# Altium PCB PJ1301-MAINPCB.PcbDoc (part 1 of 4)
Units mm, origin at the board's own origin, x right, y up, seen from the top; angles counter-clockwise.
Board outline 163.83 x 187.81 mm, 4 copper layers (Top Layer, GND, POWER, Bottom Layer); 435 components, 348 nets, 1618 pads, 913 vias.
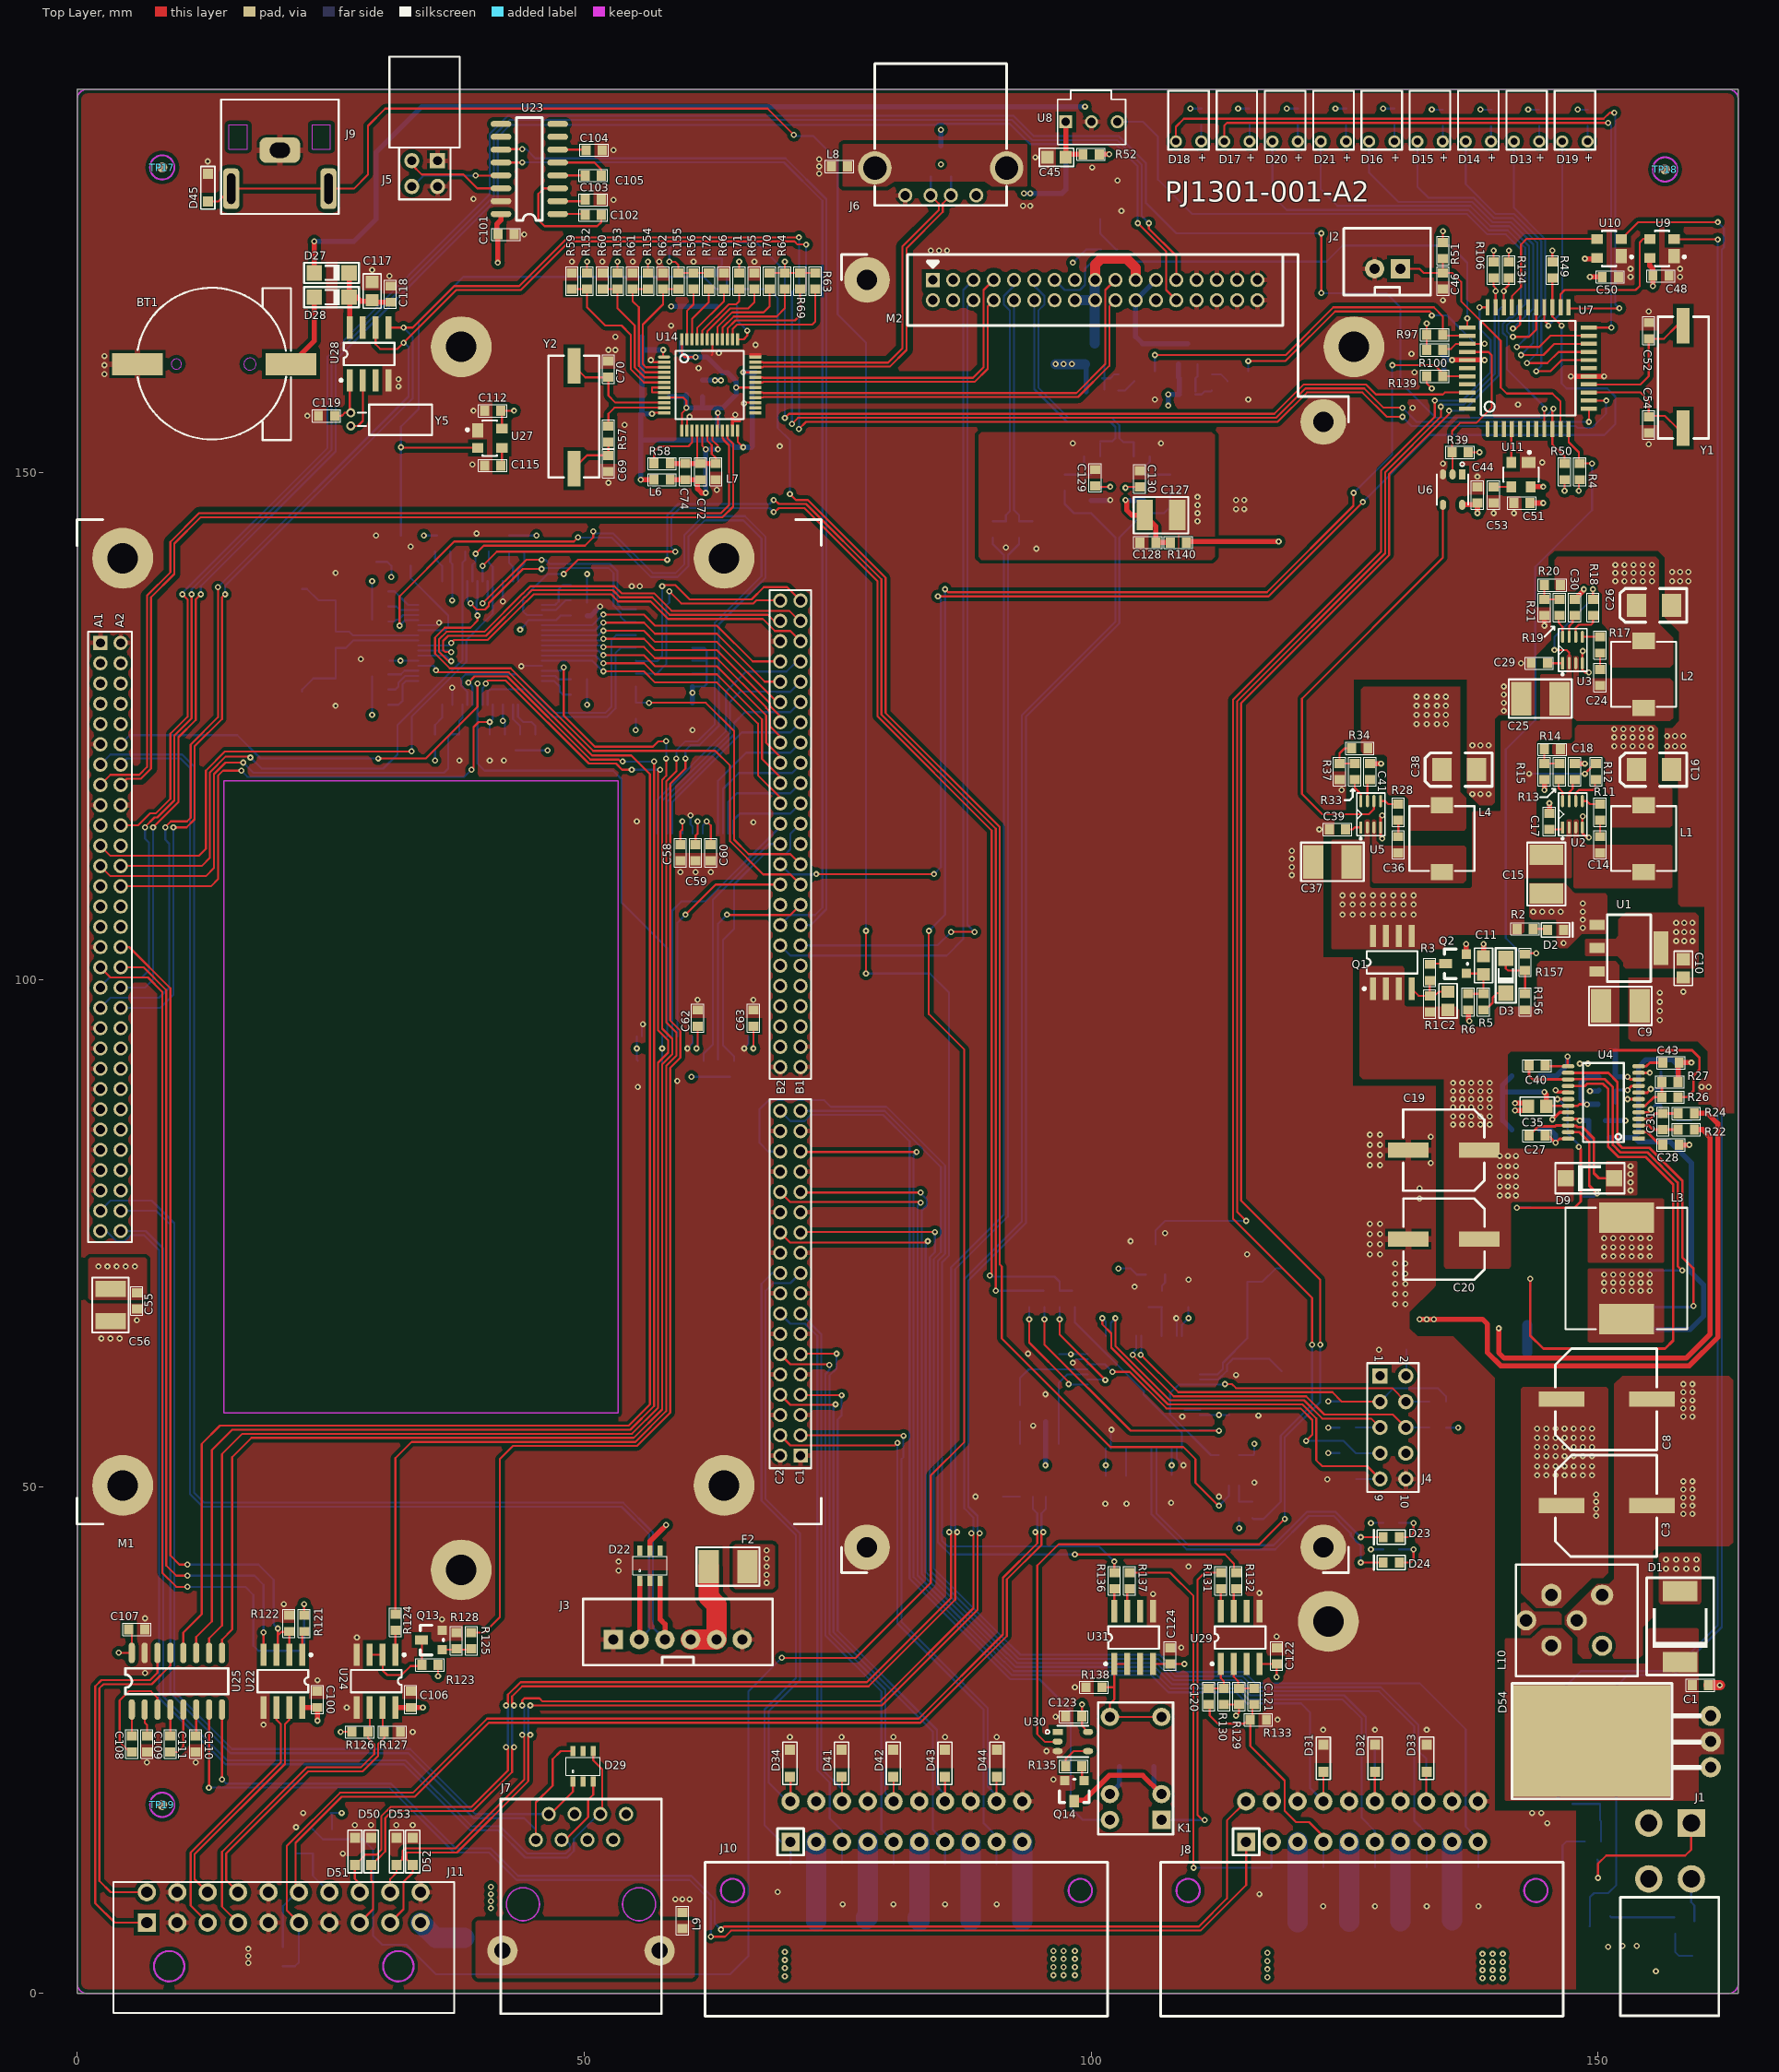
[diagram p0: Top Layer view]
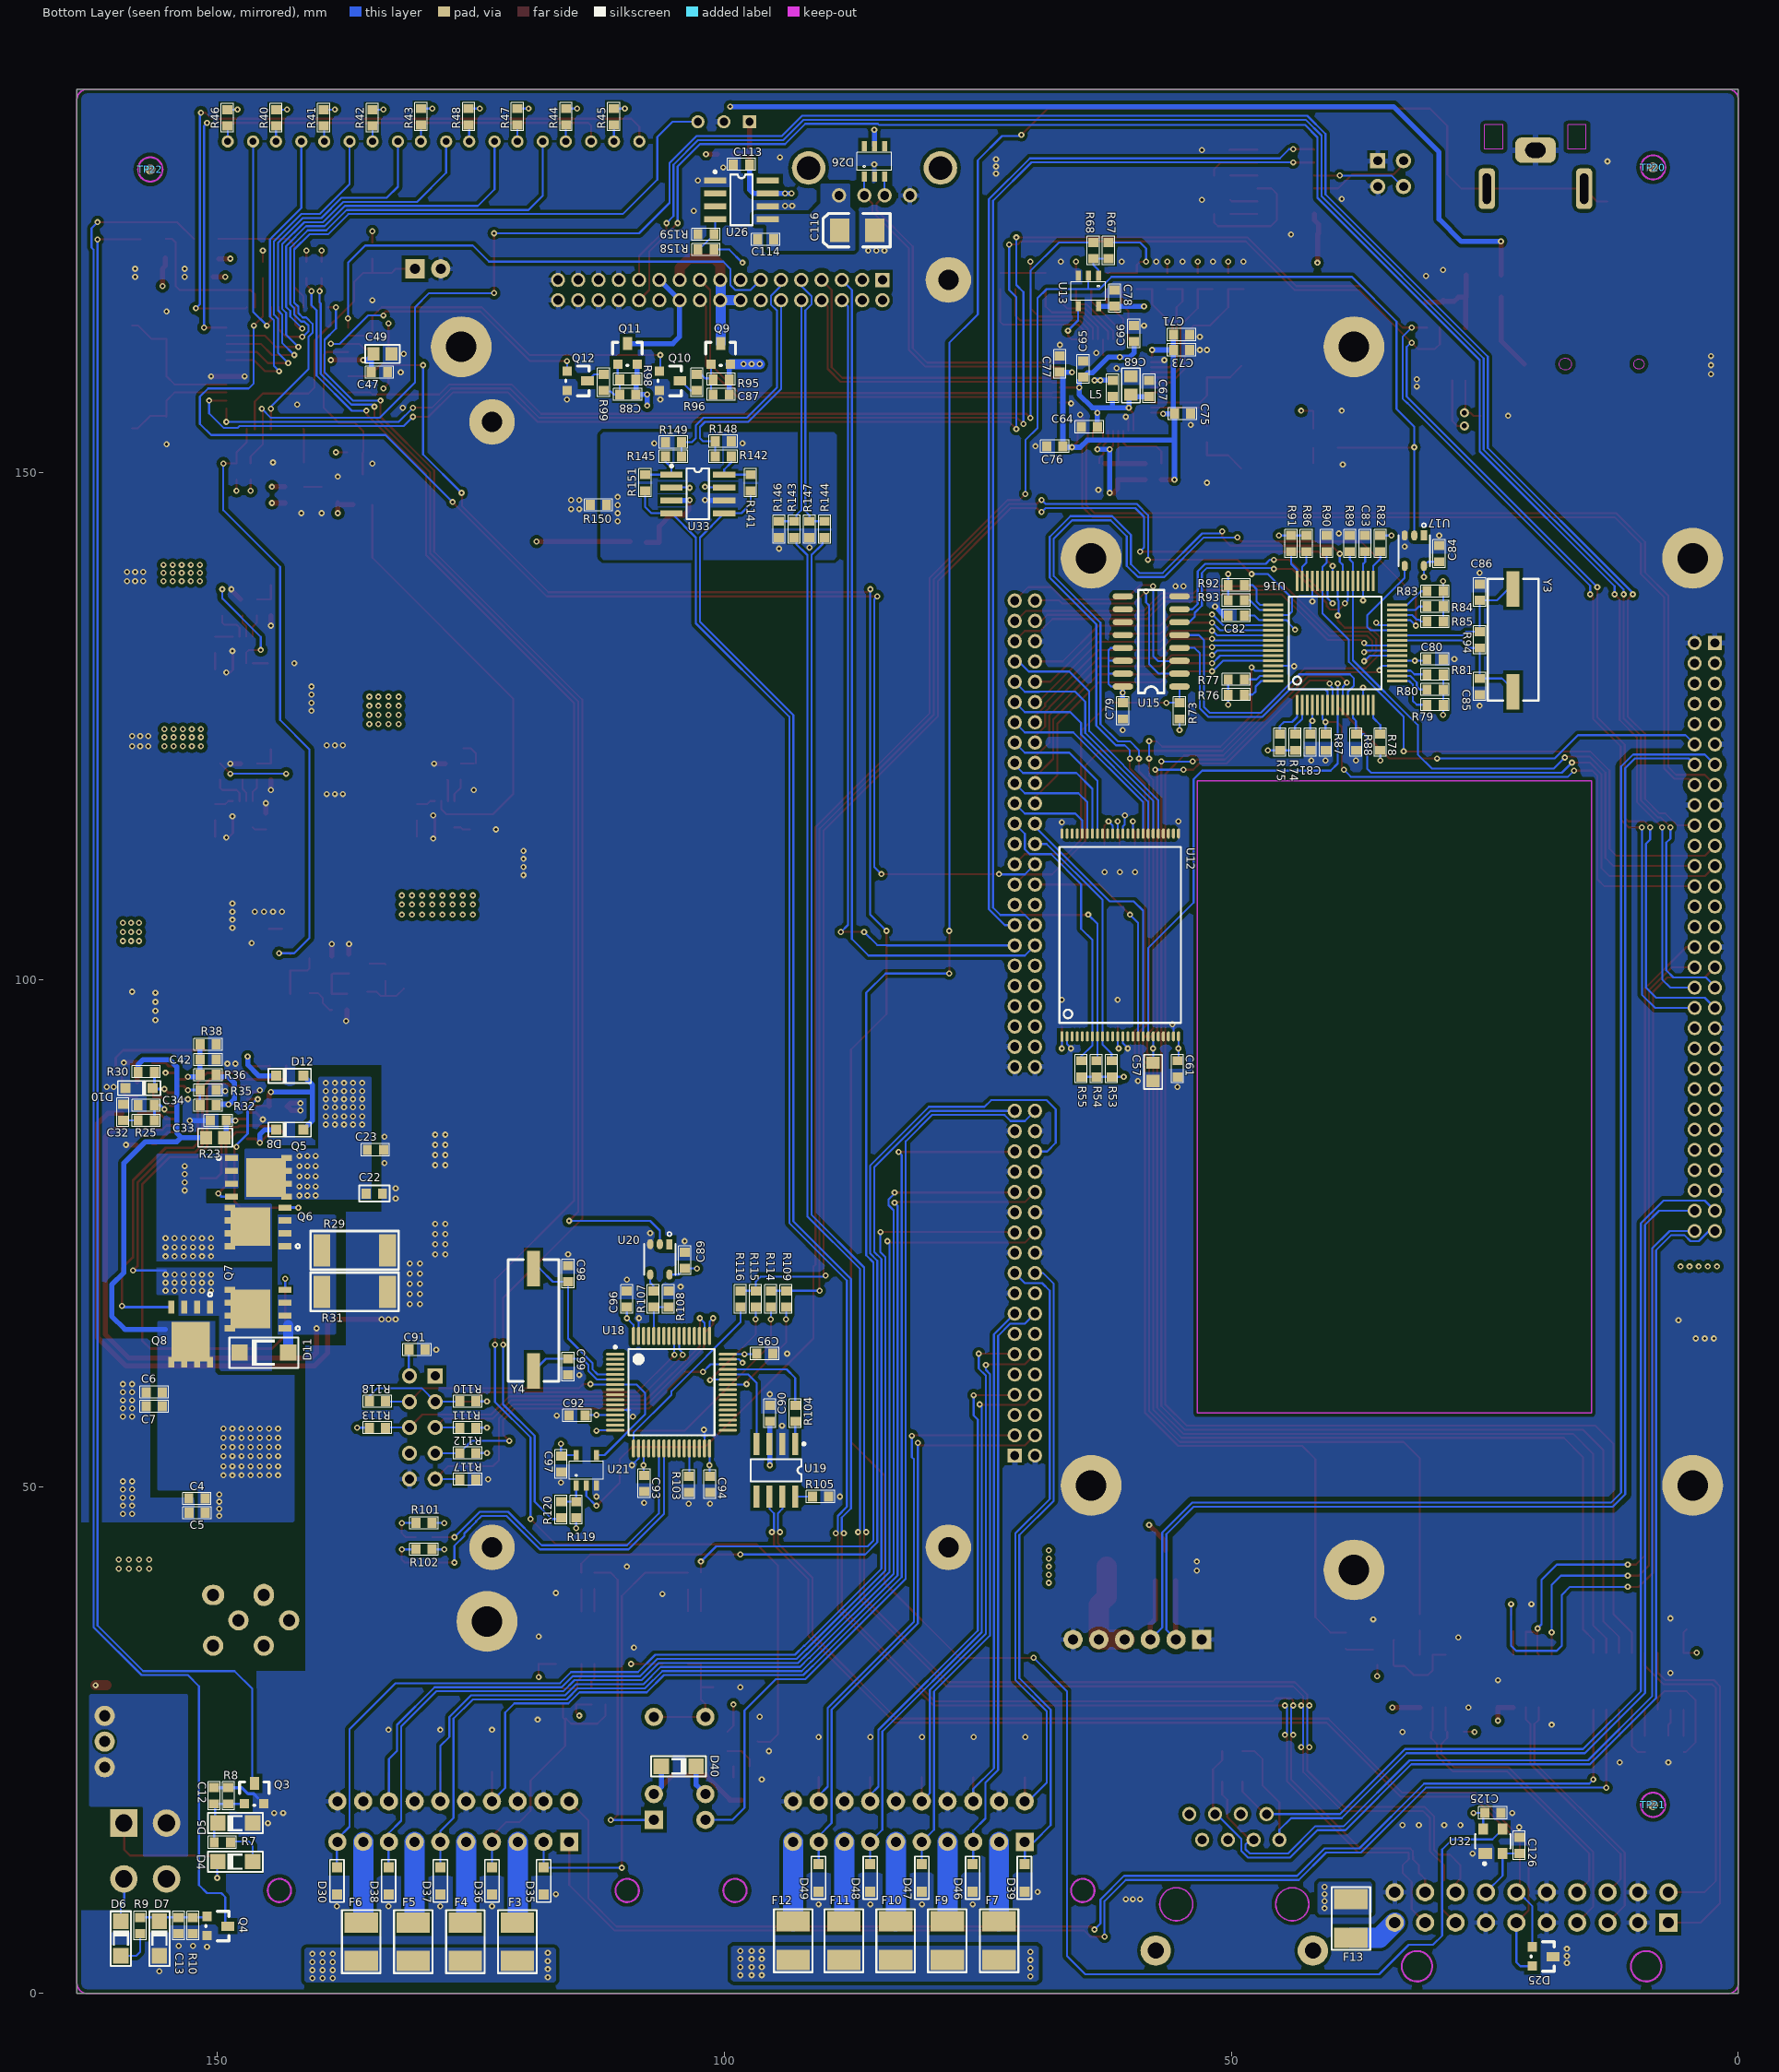
[diagram p1: Bottom Layer view, seen from below]
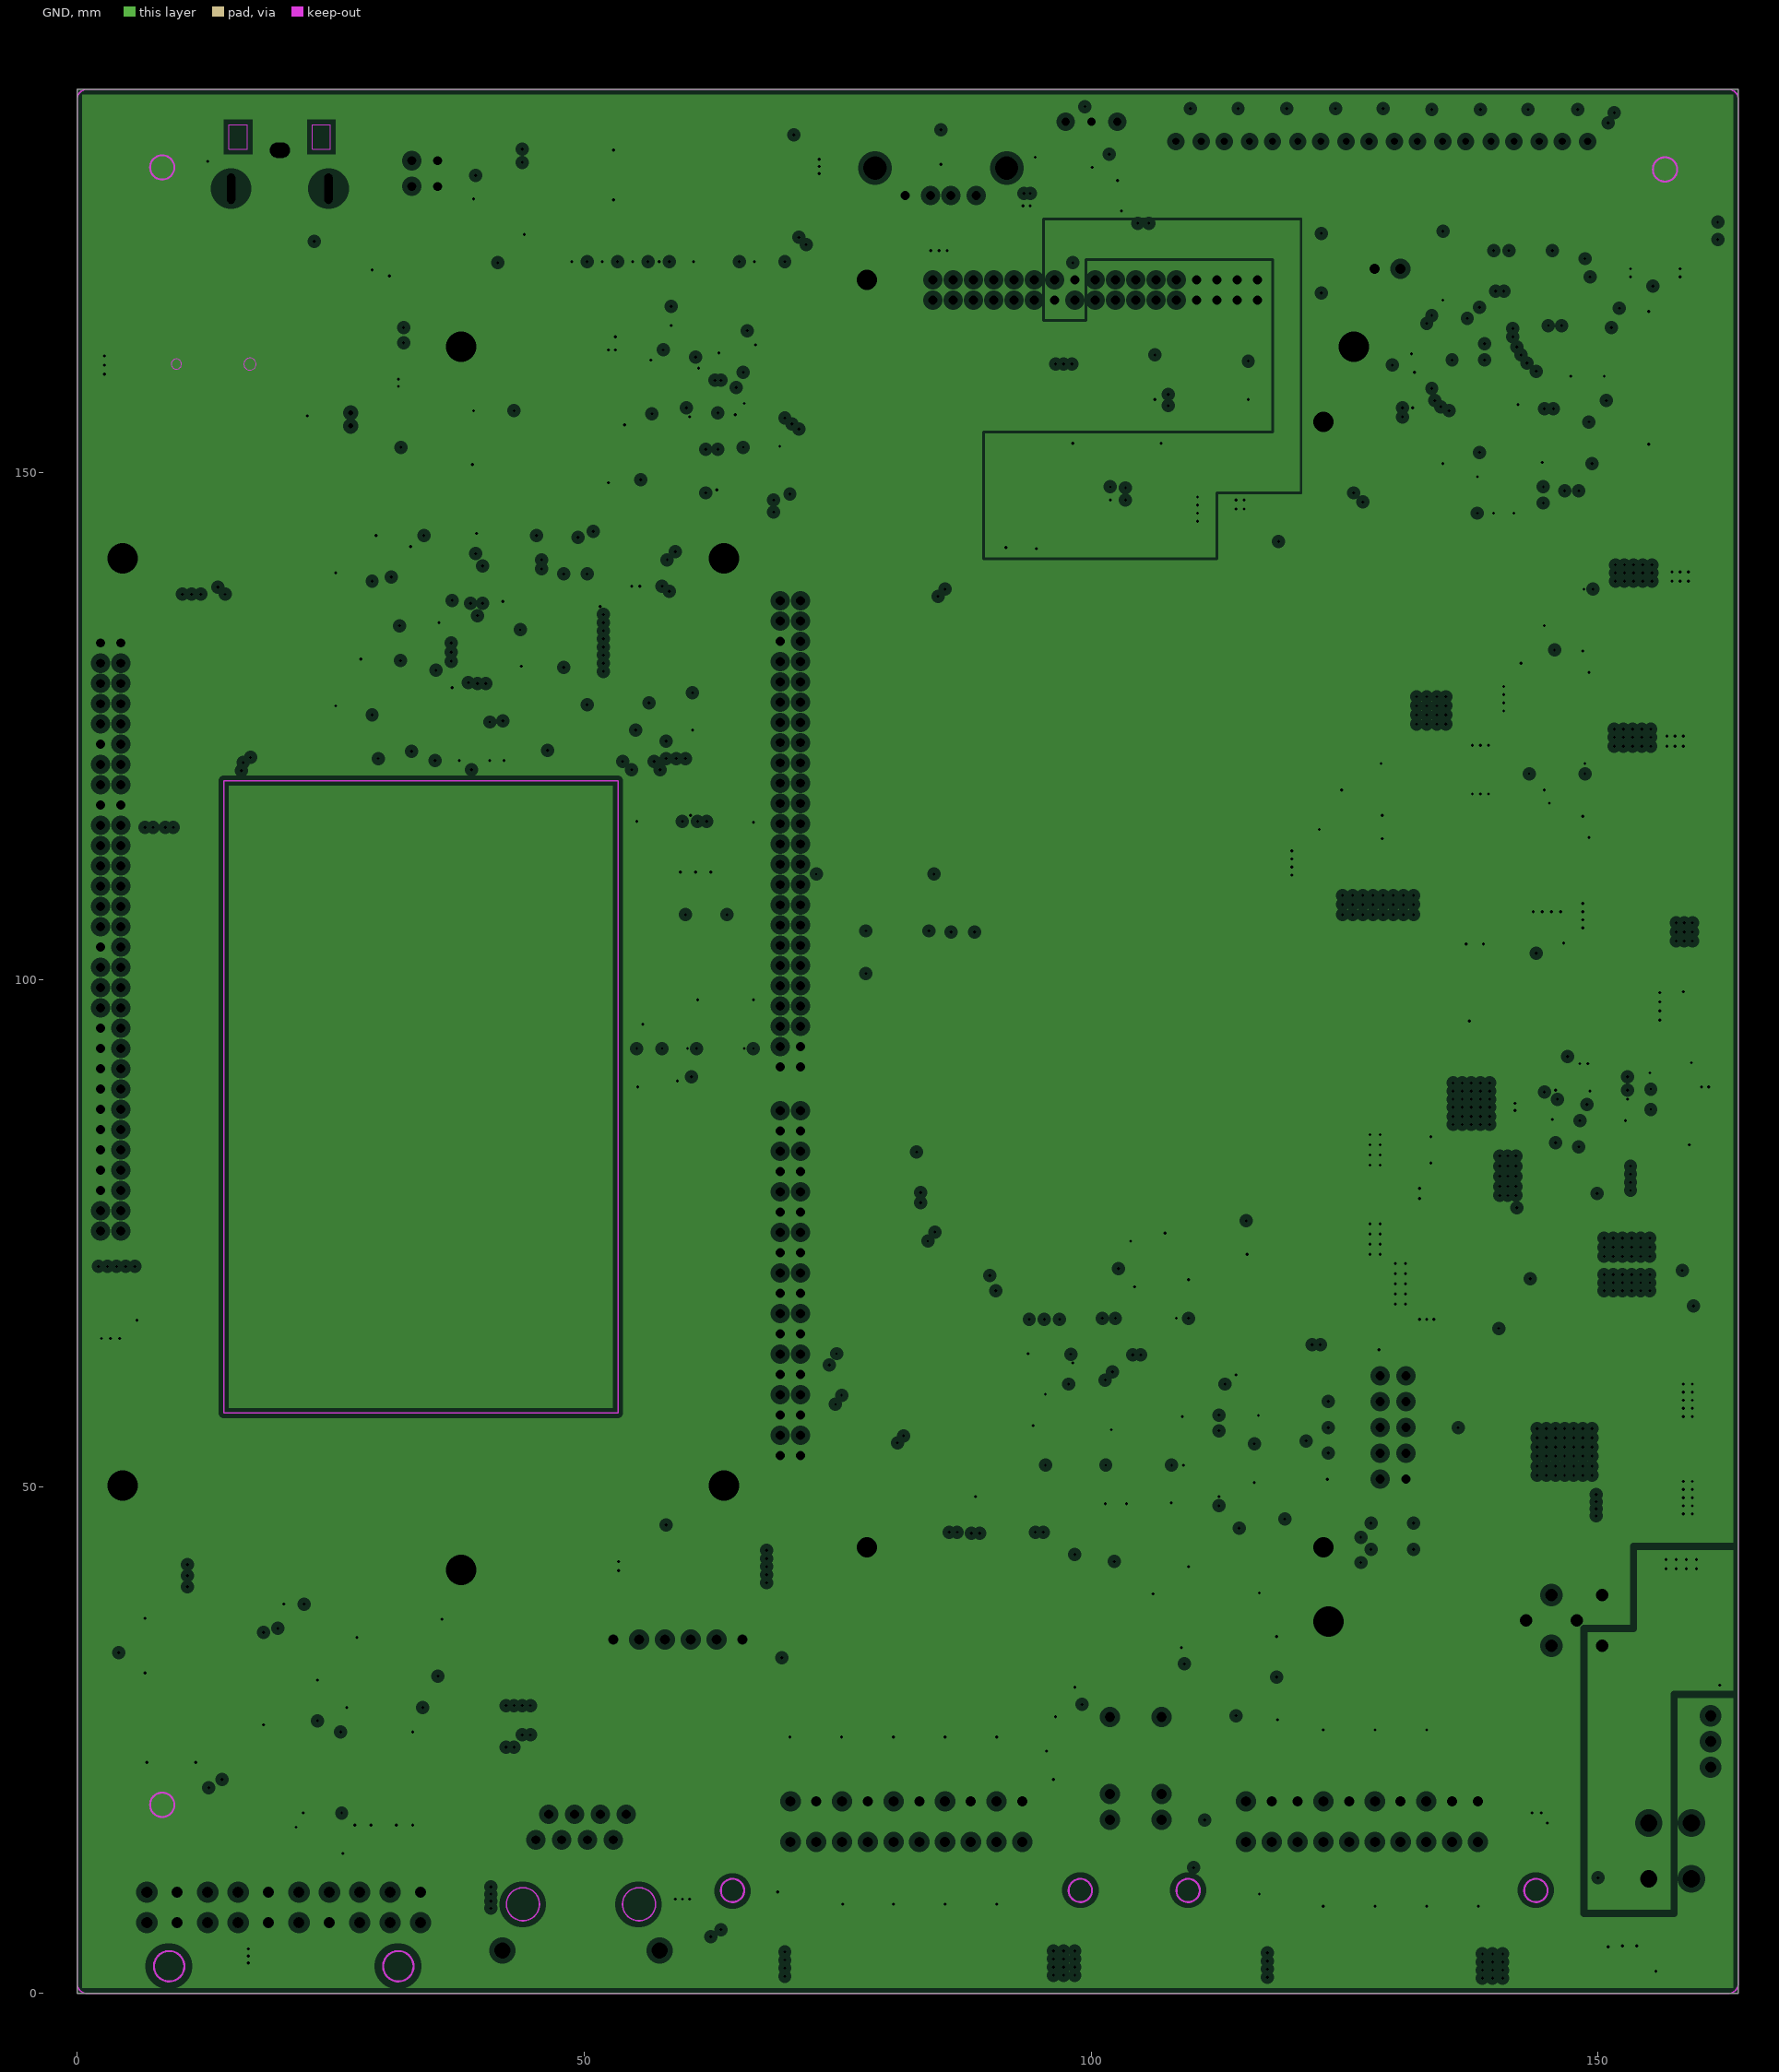
[diagram p2: GND, clearances drawn from the general rule]
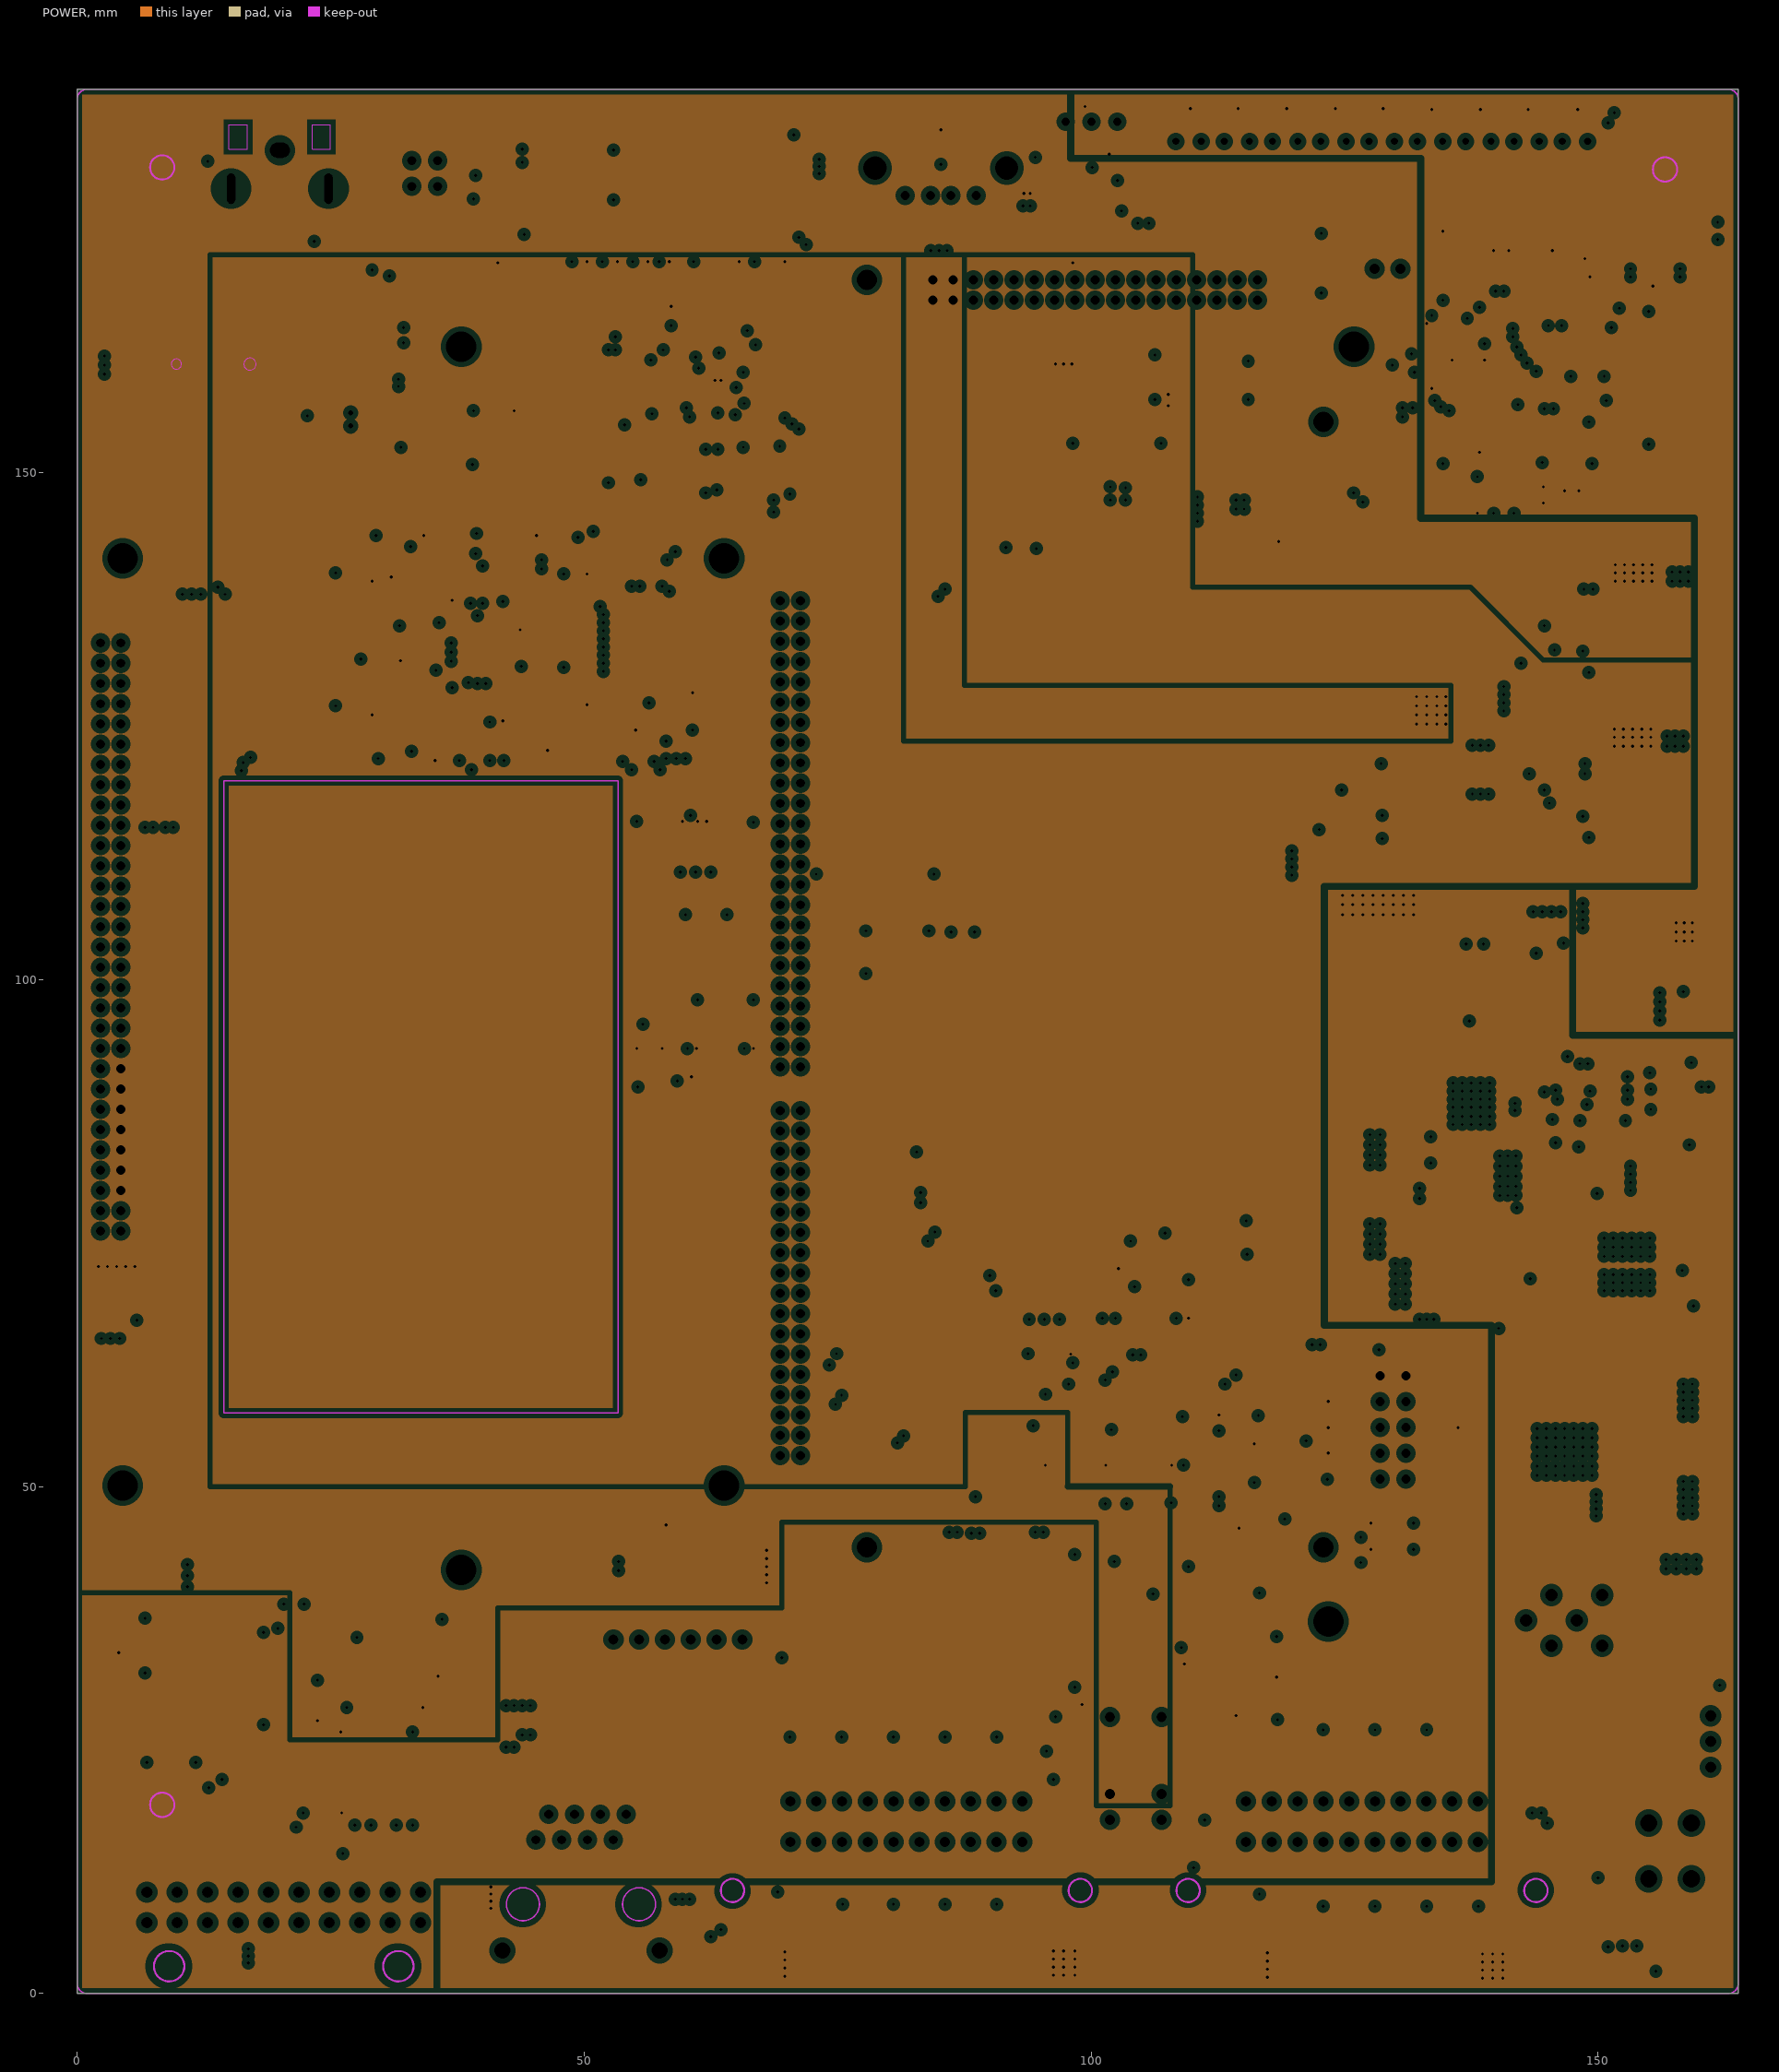
[diagram p3: POWER, clearances drawn from the general rule]

## Layer stack, top to bottom
Top Solder: solder mask 0.0102, Solder Resist, Dk 3.5
Top Layer: signal copper 0.0356
Dielectric1: core 0.32, FR-4, Dk 4.8
GND: plane copper 0.0356
Dielectric2: prepreg 0.32, FR-4, Dk 4.8
POWER: plane copper 0.0356
Dielectric3: core 0.32, FR-4, Dk 4.8
Bottom Layer: signal copper 0.0356
Bottom Solder: solder mask 0.0102, Solder Resist, Dk 3.5

## Board outline
0,0 163.83,0 163.83,187.808 0,187.808 0,0

## Design rules (kind name [scope] priority, off if disabled: settings)
Clearance Clearance_3 [InDifferentialPair('USB0') OR InDifferentialPair('USB1') OR InDifferentialPair('USB2') OR InDifferentialPair('USB3') OR InDifferentialPair('USB4') vs InNet('GND')] p1: gap=0.508
Clearance Clearance_4 [InPolygon AND InNet('GND')] p2: gap=0.35
Clearance Clearance_2 [InComponent('J5') OR InComponent('M2') OR InComponent('U14') OR InComponent('U16') OR InComponent('M1') OR InComponent('U12') OR InComponent('U4')  OR InComponent('U18') OR InComponent('J8') OR InComponent('J10') OR InComponent('U5') OR InComponent('R28') OR InComponent('C36') OR InComponent('U2') OR InComponent('R11') OR InComponent('C14') OR InComponent('U3') OR InComponent('R17') OR InComponent('C24')] p3: gap=0.2
Clearance Clearance_1 [InNet('AGND') OR InNet('GND')] p4: gap=0.254
Clearance [All] p5: gap=0.2
ComponentClearance [All] p1: gap=0 collisioncheckmode=3 verticalgap=0 showdistances=FALSE
DiffPairsRouting [All] p1: maxlimit=0.254 minlimit=0.2 mostfreqgap=0.2 toplayer_minwidth=0.381 toplayer_maxwidth=0.381 toplayer_prefwidth=0.381 bottomlayer_minwidth=0.381 bottomlayer_maxwidth=0.381 bottomlayer_prefwidth=0.381 maxuncoupledlength=12.7
PlaneClearance PlaneClearance_1 [InPadClass('MT')] p1: clearance=1
PlaneClearance [All] p2: clearance=0.508
PlaneConnect PlaneConnect_5 [InPadClass('L10')] p1: planeconnectstyle=Direct reliefexpansion=0.508 reliefentries=4 reliefconductorwidth=0.254 reliefairgap=0.254
PlaneConnect PlaneConnect_4 [InPadClass('MT2')] p2: planeconnectstyle=Direct reliefexpansion=0.508 reliefentries=4 reliefconductorwidth=0.254 reliefairgap=0.254
PlaneConnect PlaneConnect_3 [InPadClass('MT')] p3: planeconnectstyle=Direct reliefexpansion=0.508 reliefentries=4 reliefconductorwidth=0.254 reliefairgap=0.254
PlaneConnect PlaneConnect_2 [(InComponent('J1') OR InComponent('L10'))] p4: planeconnectstyle=Relief reliefexpansion=0.508 reliefentries=4 reliefconductorwidth=0.8 reliefairgap=0.508
PlaneConnect PlaneConnect_1 [IsVia] p5: planeconnectstyle=Direct reliefexpansion=0.508 reliefentries=4 reliefconductorwidth=0.254 reliefairgap=0.254
PlaneConnect [All] p6: planeconnectstyle=Relief reliefexpansion=0.508 reliefentries=4 reliefconductorwidth=0.254 reliefairgap=0.254
PolygonConnect PolygonConnect_3 [InPadClass('MT2')] p1: connectstyle=Direct reliefconductorwidth=0.254 reliefentries=4 polygonreliefangle="90 Angle" airgapwidth=0.254
PolygonConnect PolygonConnect_2 [InComponent('J9') OR InComponent('BT1') OR InComponent('C19') OR InComponent('C20')] p2: connectstyle=Relief reliefconductorwidth=0.6 reliefentries=4 polygonreliefangle="90 Angle" airgapwidth=0.254
PolygonConnect PolygonConnect_1 [InComponent('J11') OR InComponent('J10') OR InComponent('J8') OR InComponent('J3') OR InComponent('M1') OR InComponent('M2') OR InComponent('J5') OR InComponent('J2') OR InComponent('J6') OR InComponent('U8') OR InComponent('J4')] p3: connectstyle=Relief reliefconductorwidth=0.5 reliefentries=4 polygonreliefangle="90 Angle" airgapwidth=0.254
PolygonConnect [All] p4: connectstyle=Direct reliefconductorwidth=0.254 reliefentries=4 polygonreliefangle="90 Angle" airgapwidth=0.254
RoutingVias [All] p1: holewidth=0.3 width=0.6 viastyle="Through Hole" minholewidth=0.3 minwidth=0.6 maxholewidth=0.3 maxwidth=0.6
SilkToSilkClearance [All] p1: silktosilkclearance=0
SilkToSolderMaskClearance SilkscreenOverComponentPads [IsPad] p1: minsilkscreentomaskgap=0 clearancetoexposedcopper=TRUE
SolderMaskExpansion [All] p1: expansion=0.102
Width [All] p1: maxlimit=4 minlimit=0.127 preferedwidth=0.2 minimp=50.000000 maximp=50.000000 favimp=50.000000
24 further rules are at their usual default settings.

## Classes and differential pairs
pad class MT: Free-MT1 Free-MT2 Free-MT3 Free-MT4 M1-MT5 M1-MT6 M1-MT7 M1-MT8 M2-MT9 M2-MT10 M2-MT11 M2-MT12
component class [01]POWER: C1 C2 C3 C4 C5 C6 C7 C8 C9 C10 C11 C12 C13 C14 C15 C16 C17 C18 C19 C20 C22 C23 C24 C25 C26 C27 C28 C29 C30 C31 C32 C33 C34 C35 C36 C37 C38 C39 C40 C41 C42 C43 C44 D1 D2 D3 D4 D5 D6 D7 D8 D9 D10 D11 D12 D54 J1 L1 L2 L3 L4 L10 Q1 Q2 Q3 Q4 Q5 Q6 Q7 Q8 R1 R2 R3 R4 R5 R6 R7 R8 R9 R10 R11 R12 R13 R14 R15 R17 R18 R19 R20 R21 R22 R23 R24 R25 R26 R27 R28 R29 R30 R31 R32 R33 R34 R35 R36 R37 R38 R39 R156 R157 U1 U2 U3 U4 U5 U6
component class [02]MCU: C45 C46 C47 C48 C49 C50 C51 C52 C53 C54 D13 D14 D15 D16 D17 D18 D19 D20 D21 J2 R40 R41 R42 R43 R44 R45 R46 R47 R48 R49 R50 R51 R52 U7 U8 U9 U10 U11 Y1
component class [03]CORE_BOARD: C55 C56 M1
component class [04]STORAGE: C57 C58 C59 C60 C61 C62 C63 D22 F2 J3 R53 R54 R55 U12
component class [05]USB_HUB: C64 C65 C66 C67 C68 C69 C70 C71 C72 C73 C74 C75 C76 C77 C78 L5 L6 L7 R56 R57 R58 R59 R60 R61 R62 R63 R64 R65 R66 R67 R68 R69 R70 R71 R72 R152 R153 R154 R155 U13 U14 Y2
component class [06]EXT_UART: C79 C80 C81 C82 C83 C84 C85 C86 R73 R74 R75 R76 R77 R78 R79 R80 R81 R82 R83 R84 R85 R86 R87 R88 R89 R90 R91 R92 R93 R94 U15 U16 U17 Y3
component class [07]COMM_BOARD: C87 C88 M2 Q9 Q10 Q11 Q12 R95 R96 R97 R98 R99 R100
component class [08]CAN: C89 C90 C91 C92 C93 C94 C95 C96 C97 C98 C99 D23 D24 D25 J4 R101 R102 R103 R104 R105 R106 R107 R108 R109 R110 R111 R112 R113 R114 R115 R116 R117 R118 R119 R120 U18 U19 U20 U21 Y4
component class [09]SERIAL_PORT: C100 C101 C102 C103 C104 C105 C106 C107 C108 C109 C110 C111 J5 Q13 R121 R122 R123 R124 R125 R126 R127 R128 U22 U23 U24 U25
component class [10]MISC: BT1 C112 C113 C114 C115 C116 C117 C118 C119 D26 D27 D28 D29 J6 J7 L8 L9 R158 R159 U26 U27 U28 Y5
component class [11]VIDEO_PORT: C120 C121 C122 C123 C124 D30 D31 D32 D33 D34 D35 D36 D37 D38 D39 D40 D41 D42 D43 D44 D45 D46 D47 D48 D49 F3 F4 F5 F6 F7 F9 F10 F11 F12 J8 J9 J10 K1 Q14 R129 R130 R131 R132 R133 R134 R135 R136 R137 R138 U29 U30 U31
component class [12]IO_PORT: C125 C126 C127 C128 C129 C130 D50 D51 D52 D53 F13 J11 R139 R140 R141 R142 R143 R144 R145 R146 R147 R148 R149 R150 R151 U32 U33
pad class MT2: M1-MT5 M1-MT6 M1-MT7 M1-MT8 M2-MT9 M2-MT10 M2-MT11 M2-MT12
pad class L10: L10-2
differential pair AUD-IN: +AUD-IN_P -AUD-IN_N
differential pair AUD-OUT: +AUD-OUT_P -AUD-OUT_N
differential pair C-AUDIO-IN: +C-AUDIO-IN_P -C-AUDIO-IN_N
differential pair C-AUDIO-OUT: +C-AUDIO-OUT_P -C-AUDIO-OUT_N
differential pair CAN: +CAN_P -CAN_N
differential pair E0RX: +E0RX_P -E0RX_N
differential pair E0TX: +E0TX_P -E0TX_N
differential pair RS485-1: +RS485-1_P -RS485-1_N
differential pair RS485-2: +RS485-2_P -RS485-2_N
differential pair USB0: +USB0_P -USB0_N
differential pair USB1: +USB1_P -USB1_N
differential pair USB2: +USB2_P -USB2_N
differential pair USB3: +USB3_P -USB3_N
differential pair USB4: +USB4_P -USB4_N

## Components (designator, comment, footprint, x,y, rotation, side; value= is the part's Value field where it differs from the comment)
BT1 "Battery" CR1220 13.3,160.7 r0 top
C1 "0.1uF" 0603 160.1,30.4 r270 top
C2 "1uF/25V" 0805 135.2,98.8 r270 top
C3 "220uF/50V" DL-10*10.5 150.8,48.1 r90 top
C4 "0.1uF" 0603 152,48.8 r90 bottom
C5 "1000pF" 0603 151.992,47.4 r90 bottom
C6 "0.1uF" 0603 156.2,59.3 r90 bottom
C7 "1000pF" 0603 156.2,57.9 r90 bottom
C8 "220uF/50V" DL-10*10.5 150.8,58.6 r90 top
C9 "10uF/25V" 1812 154.1,97.4 r180 top
C10 "10uF/6.3V" 0805 158.4,100.2 r90 top
C11 "10uF/6.3V" 0805 138.7,102.3 r270 top
C12 "0.1uF" 0603 150.3,19.5 r0 bottom
C13 "0.1uF" 0603 153.8,6.7 r180 bottom
C14 "0.1uF" 0603 150.2,113.3 r180 top
C15 "10uF/25V" 1812 144.9,108.5 r90 top
C16 "47uF/10V(tan)" 3528 153.8,120.7 r180 top
C17 "0.022uF" 0603 145.2,115.6 r0 top
C18 "0.1uF" 0603 147.7,120.5 r0 top
C19 "220uF/25V" DL-8*10.5 134.792,83.171 r270 top
C20 "220uF/25V" DL-8*10.5 134.8,74.4 r270 top
C22 "0.1uF" 0603 134.5,78.9 r270 bottom
C23 "0.1uF" 0603 134.4,83.2 r270 bottom
C24 "0.1uF" 0603 150.2,129.8 r180 top
C25 "10uF/25V" 1812 142.4,127.7 r0 top
C26 "47uF/10V(tan)" 3528 153.8,136.9 r180 top
C27 "0.22uF" 0603 144,84.6 r90 top
C28 "0.033uF" 0603 157.2,83.7 r270 top
C29 "0.022uF" 0603 144.2,131.2 r90 top
C30 "0.1uF" 0603 147.7,136.7 r0 top
C31 "68pF" 0603 156.4,86 r0 top
C32 "0.01uF" 0603 159.3,86.9 r180 bottom
C33 "0.1uF" 0603 149.9,86.1 r90 bottom
C34 "100pF" 0603 157,87.6 r270 bottom
C35 "4.7uF/16V" 0805 144.9,87.5 r180 top
C36 "0.1uF" 0603 130.3,113.3 r180 top
C37 "10uF/25V" 1812 121.9,111.6 r0 top
C38 "47uF/10V(tan)" 3528 134.6,120.7 r180 top
C39 "0.068uF" 0603 124.3,114.8 r90 top
C40 "0.22uF" 0603 144,91.5 r90 top
C41 "0.1uF" 0603 127.5,120.5 r0 top
C42 "1000pF" 0603 150.9,92.1 r90 bottom
C43 "0.01uF" 0603 157.2,91.8 r270 top
C44 "0.1uF" 0603 138.1,147.8 r180 top
C45 "10uF/6.3V" 0805 95.7,181.1 r0 top
C46 "0.1uF" 0603 134.7,168.9 r180 top
C47 "0.1uF" 0603 134,159.9 r270 bottom
C48 "0.1uF" 0603 156.2,169.4 r270 top
C49 "10uF/6.3V" 0805 132.8,161.7 r0 bottom
C50 "0.1uF" 0603 151.2,169.3 r270 top
C51 "0.1uF" 0603 142.5,147 r90 top
C52 "27pF" 0603 155,164 r0 top
C53 "0.1uF" 0603 139.7,147.8 r0 top
C54 "27pF" 0603 155,154.7 r180 top
C55 "0.01uF" 0603 5.9,68.3 r180 top
C56 "22uF/10V" 1210 3.3,66.3 r90 top
C57 "10uF/6.3V" 0805 57.7,90 r90 bottom
C58 "0.1uF" 0603 59.5,112.5 r180 top
C59 "0.1uF" 0603 61,112.5 r180 top
C60 "0.1uF" 0603 62.5,112.5 r180 top
C61 "0.1uF" 0603 55.3,91.2 r0 bottom
C62 "0.1uF" 0603 61.2,96.2 r0 top
C63 "0.1uF" 0603 66.7,96.2 r0 top
C64 "0.1uF" 0603 64,154.5 r90 bottom
C65 "0.1uF" 0603 64.6,160.2 r180 bottom
C66 "0.1uF" 0603 59.6,163.7 r180 bottom
C67 "0.1uF" 0603 58.1,158.3 r180 bottom
C68 "10uF/6.3V" 0805 59.9,159.5 r270 bottom
C69 "22pF" 0603 52.4,150.9 r180 top
C70 "22pF" 0603 52.4,160.2 r0 top
C71 "0.1uF" 0603 54.9,163.6 r270 bottom
C72 "0.1uF" 0603 61.5,150.1 r0 top
C73 "4.7uF/6.3V" 0603 54.9,162.1 r270 bottom
C74 "4.7uF/6.3V" 0603 60,150.1 r0 top
C75 "0.1uF" 0603 54.8,155.8 r270 bottom
C76 "0.1uF" 0603 67.4,152.6 r90 bottom
C77 "0.1uF" 0603 66.9,160.7 r180 bottom
C78 "0.1uF" 0603 61.5,167.2 r0 bottom
C79 "0.1uF" 0603 60.7,126.5 r180 bottom
C80 "0.1uF" 0603 29.9,131.6 r270 bottom
C81 "0.1uF" 0603 42.2,123.4 r0 bottom
C82 "0.1uF" 0603 49.5,135.9 r90 bottom
C83 "0.1uF" 0603 36.8,143 r180 bottom
C84 "0.1uF" 0603 29.5,142 r0 bottom
C85 "22pF" 0603 25.5,128.9 r0 bottom
C86 "22pF" 0603 25.5,138.2 r180 bottom
C87 "1uF/10V" 0603 100.3,157.7 r270 bottom
C88 "1uF/10V" 0603 109.5,157.7 r270 bottom
C89 "0.1uF" 0603 103.9,72.3 r0 bottom
C90 "0.1uF" 0603 95.5,57.2 r180 bottom
C91 "0.1uF" 0603 130.3,63.5 r270 bottom
C92 "0.1uF" 0603 114.5,57 r90 bottom
C93 "0.1uF" 0603 107.9,50.3 r0 bottom
C94 "0.1uF" 0603 101.4,50.2 r0 bottom
C95 "0.1uF" 0603 96,63.1 r270 bottom
C96 "0.1uF" 0603 109.6,68.5 r180 bottom
C97 "0.1uF" 0603 116.1,52.2 r180 bottom
C98 "10pF" 0603 115.4,71 r180 bottom
C99 "10pF" 0603 115.4,61.8 r0 bottom
C100 "0.1uF" 0603 23.7,29 r0 top
C101 "0.1uF" 0603 42.3,173.5 r90 top
C102 "0.1uF" 0603 50.9,175.4 r90 top
C103 "0.1uF" 0603 50.9,176.9 r90 top
C104 "0.1uF" 0603 51,181.8 r90 top
C105 "0.1uF" 0603 50.9,179.3 r90 top
C106 "0.1uF" 0603 32.9,29 r180 top
C107 "0.1uF" 0603 5.9,35.9 r90 top
C108 "0.1uF" 0603 5.4,24.6 r0 top
C109 "0.1uF" 0603 6.9,24.6 r0 top
C110 "0.1uF" 0603 11.7,24.6 r0 top
C111 "0.1uF" 0603 9.2,24.6 r0 top
C112 "0.1uF" 0603 41,156.1 r90 top
C113 "0.1uF" 0603 98.3,180.4 r270 bottom
C114 "0.1uF" 0603 95.9,173 r270 bottom
C115 "0.1uF" 0603 41,150.7 r270 top
C116 "33uF/16V(tan)" 3528 88.6,173.9 r0 bottom
C117 "10uF/6.3V" 0805 29.1,167 r90 top
C118 "0.1uF" 0603 30.9,167.6 r180 top
C119 "15pF" 0603 24.6,155.6 r270 top
C120 "0.1uF" 0603 111.6,29.3 r180 top
C121 "0.1uF" 0603 116.1,29.3 r180 top
C122 "0.1uF" 0603 118.3,33.3 r180 top
C123 "0.1uF" 0603 98.3,27.3 r90 top
C124 "0.1uF" 0603 107.8,33.3 r180 top
C125 "0.1uF" 0603 24.2,17.8 r90 bottom
C126 "1000pF" 0603 21.6,14.6 r0 bottom
C127 "22uF/10V" 1210 108.5,145.8 r180 top
C128 "0.1uF" 0603 105.6,143.1 r90 top
C129 "0.1uF" 0603 100.4,149.5 r180 top
C130 "0.22uF" 0603 104.8,149.4 r180 top
D1 "SMDJ33A" DO214AB 158.1,39.7 r270 top
D2 "LED GREEN" LED0603 145,104.9 r90 top
D3 "1N4148" MINI-MELF 140.9,102.1 r270 top
D4 "ZMM55-C6V2" MINI-MELF 146.5,13 r0 bottom
D5 "1N4148" MINI-MELF 146.5,16.8 r0 bottom
D6 "ZMM55-C6V2" MINI-MELF 159.5,3.7 r90 bottom
D7 "1N4148" MINI-MELF 155.7,3.7 r90 bottom
D8 "1N5819HW" 1N5819 144.2,85.2 r180 bottom
D9 "B360A" B320A 151.6,80.4 r180 top
D10 "MM3Z5V1ST1G" MM3Z5V1ST1G 157.7,89.3 r0 bottom
D11 "B360A" B320A 143,63.2 r0 bottom
D12 "1N5819HW" 1N5819 144.2,90.5 r180 bottom
D13 "LED GREEN" LED-3MM 141.704,182.661 r0 top locked
D14 "LED GREEN" LED-3MM 136.941,182.661 r0 top locked
D15 "LED GREEN" LED-3MM 132.179,182.661 r0 top locked
D16 "LED GREEN" LED-3MM 127.416,182.661 r0 top locked
D17 "LED GREEN" LED-3MM 113.128,182.661 r0 top locked
D18 "LED GREEN" LED-3MM 108.366,182.661 r0 top locked
D19 "LED GREEN" LED-3MM 146.466,182.661 r0 top locked
D20 "LED GREEN" LED-3MM 117.891,182.661 r0 top locked
D21 "LED GREEN" LED-3MM 122.653,182.661 r0 top locked
D22 "SRV05-4" SOT23-6 55.5,40.7 r0 top
D23 "LED RED" LED0603 130.4,45 r270 top
D24 "LED RED" LED0603 130.4,42.5 r270 top
D25 "PESD2CAN" PESD2CAN 20.3,4.6 r270 bottom
D26 "SRV05-4" SOT23-6 86.2,179.2 r180 bottom
D27 "1N4148" MINI-MELF 23.4,169.7 r0 top
D28 "1N4148" MINI-MELF 23.4,167.3 r0 top
D29 "SRV05-4" SOT23-6 48.9,20.9 r0 top
D30 "PESD5V0L1BA" SOD323 138.2,11.1 r90 bottom
D31 "PESD5V0L1BA" SOD323 122.9,23.2 r270 top
D32 "PESD5V0L1BA" SOD323 128,23.2 r270 top
D33 "PESD5V0L1BA" SOD323 133.1,23.2 r270 top
D34 "PESD5V0L1BA" SOD323 70.3,22.7 r270 top
D35 "PESD5V0L1BA" SOD323 117.8,11.1 r90 bottom
D36 "PESD5V0L1BA" SOD323 122.9,11.1 r90 bottom
D37 "PESD5V0L1BA" SOD323 128,11.1 r90 bottom
D38 "PESD5V0L1BA" SOD323 133.1,11.1 r90 bottom
D39 "PESD5V0L1BA" SOD323 70.4,11.4 r90 bottom
D40 "1N4148" MINI-MELF 106.2,22.4 r180 bottom
D41 "PESD5V0L1BA" SOD323 75.4,22.7 r270 top
D42 "PESD5V0L1BA" SOD323 80.5,22.7 r270 top
D43 "PESD5V0L1BA" SOD323 85.6,22.7 r270 top
D44 "PESD5V0L1BA" SOD323 90.7,22.7 r270 top
D45 "PESD5V0L1BA" SOD323 12.9,178.1 r270 top
D46 "PESD5V0L1BA" SOD323 75.5,11.4 r90 bottom
D47 "PESD5V0L1BA" SOD323 80.5,11.4 r90 bottom
D48 "PESD5V0L1BA" SOD323 85.6,11.4 r90 bottom
D49 "PESD5V0L1BA" SOD323 90.7,11.4 r90 bottom
D50 "PESD5V0L1BA" SOD323 29,14 r270 top
D51 "PESD5V0L1BA" SOD323 27.4,14 r270 top
D52 "PESD5V0L1BA" SOD323 33.1,14 r270 top
D53 "PESD5V0L1BA" SOD323 31.5,14 r270 top
D54 "V20100SG" V20100SG 161.1,22.3 r90 top
F2 "1.1A/16V" 1812 62.3,42.1 r0 top
F3 "1.1A/16V" 1812 120.4,3.2 r90 bottom
F4 "500mA/16V" 1812 125.533,3.2 r90 bottom
F5 "500mA/16V" 1812 130.667,3.2 r90 bottom
F6 "500mA/16V" 1812 135.8,3.2 r90 bottom
F7 "500mA/16V" 1812 72.9,3.3 r90 bottom
F9 "500mA/16V" 1812 78,3.3 r90 bottom
F10 "500mA/16V" 1812 83.1,3.3 r90 bottom
F11 "500mA/16V" 1812 88.2,3.3 r90 bottom
F12 "500mA/16V" 1812 93.2,3.3 r90 bottom
F13 "1.1A/16V" 1812 38.2,9.3 r270 bottom
J1 "POWER" 5557-4PIN 159.2,16.8 r270 top locked
J2 "HDD LOCK" CON-2PIN 130.5,170.1 r0 top
J3 "HDD" HDD-CONN 65.6,34.9 r180 top
J4 "JTAG" HDR2X5 128.5,60.9 r270 top
J5 "CONSOLE" HDR2X2H 33.014,180.762 r180 top locked
J6 "USB HOST" USB-HOST 81.679,177.345 r180 top locked
J7 "ETHERNET" RJ45 49.7,8.8 r0 top locked
J8 "AV CONN1" CONN2X10 115.287,18.951 r90 top locked
J9 "VIDEO OUT" RCA2 20,181.8 r180 top locked
J10 "AV CONN2" CONN2X10 70.361,18.951 r90 top locked
J11 "I/O" COMM-3MM-2X10 6.883,9.981 r0 top locked
K1 "G5V-1" G5V-1 104.4,22.2 r180 top
L1 "4.7uH/4A" IND-4.7UH-4A 154.5,113.9 r0 top
L2 "4.7uH/4A" IND-4.7UH-4A 154.5,130.1 r0 top
L3 "8.2uH/6.25A" IND-8.2UH-10A 152.8,71.5 r0 top
L4 "4.7uH/4A" IND-4.7UH-4A 134.6,113.9 r0 top
L5 "300ohm/100MHz BEAD" 0603 61.7,158.3 r0 bottom
L6 "300ohm/100MHz BEAD" 0603 57.7,149.3 r270 top
L7 "300ohm/100MHz BEAD" 0603 63,150.1 r0 top
L8 "300ohm/100MHz BEAD" 0603 75.2,180.2 r270 top
L9 "300ohm/100MHz BEAD" 0603 59.7,7.2 r180 top
L10 "BNX002-01" BNX002-001 147.9,36.8 r180 top
M1 "EM9008-CORE-BOARD" EM9008 73.4,46.3 r90 top locked
M2 "COMM_BOARD" COMM_BOARD_2 75.4,171.5 r270 top locked
Q1 "AO4435" SO8 129.7,101.7 r0 top
Q2 "S9014" NPN 137,100.6 r90 top
Q3 "S9014" NPN 147.3,18.7 r180 bottom
Q4 "S9014" NPN 151,7.6 r270 bottom
Q5 "SI7460DP" POWERPAK 148.6,82.4 r180 bottom
Q6 "SI7460DP" POWERPAK 143.3,73.7 r0 bottom
Q7 "SI7460DP" POWERPAK 143.3,65.6 r0 bottom
Q8 "SI7460DP" POWERPAK 150.7,67.7 r270 bottom
Q9 "Si2305" MOSFET 101.305,160.7 r180 bottom
Q10 "S9014" NPN 106.4,160 r270 bottom
Q11 "Si2305" MOSFET 110.5,160.7 r180 bottom
Q12 "S9014" NPN 115.5,160 r270 bottom
Q13 "S9014" NPN 36,33.9 r90 top
Q14 "S9014" NPN 99.3,21 r180 top
R1 "100K" 0603 133.4,97.6 r0 top
R2 "1K" 0603 142.8,105 r270 top
R3 "10K" 0603 133.4,100.7 r0 top
R4 "47K" 0603 148.2,150.1 r180 top
R5 "47K" 0603 138.7,97.8 r0 top
R6 "47K" 0603 137.2,97.8 r180 top
R7 "47K" 0603 149.5,14.9 r90 bottom
R8 "47K" 0603 148.9,19.5 r0 bottom
R9 "47K" 0603 157.6,6.7 r180 bottom
R10 "47K" 0603 152.4,6.7 r180 bottom
R11 "10" 0603 150.2,116.5 r180 top
R12 "100K" 0603 149.8,120.5 r180 top
R13 "33K/1%" 0603 146.2,120.5 r0 top
R14 "40.2K/1%" 0603 145.5,122.7 r270 top
R15 "13K/1%" 0603 144.7,120.5 r0 top
R17 "10" 0603 150.2,133 r180 top
R18 "100K" 0603 149.5,136.7 r180 top
R19 "33K/1%" 0603 146.2,136.7 r0 top
R20 "40.2K/1%" 0603 145.5,138.9 r270 top
R21 "7.68K/1%" 0603 144.7,136.7 r0 top
R22 "100" 0603 158.7,85.2 r270 top
R23 "10" 0805 149.3,84.4 r0 bottom
R24 "100" 0603 158.7,86.8 r270 top
R25 "100K/1%" 0603 157,86.1 r90 bottom
R26 "113K/1%" 0603 157.1,88.4 r270 top
R27 "8.06K/1%" 0603 157.1,89.9 r90 top
R28 "10" 0603 130.3,116.5 r180 top
R29 "0.018/1W" 2512 133.2,73.3 r0 bottom
R30 "220K" 0603 157,90.9 r90 bottom
R31 "0.018/1W" 2512 133.2,69.2 r0 bottom
R32 "NC" 0603 150.9,87.6 r270 bottom
R33 "33K/1%" 0603 126,120.5 r0 top
R34 "40.2K/1%" 0603 126.5,122.8 r270 top
R35 "0" 0603 150.9,89.1 r270 bottom
R36 "15K" 0603 150.9,90.6 r90 bottom
R37 "13K/1%" 0603 124.5,120.5 r0 top
R38 "10K/1%" 0603 150.9,93.6 r90 bottom
R39 "10K" 0603 136.4,152 r270 top
R40 "200" 0603 144.2,185 r180 bottom
R41 "200" 0603 139.5,185 r180 bottom
R42 "200" 0603 134.7,185 r180 bottom
R43 "200" 0603 129.9,185.1 r180 bottom
R44 "200" 0603 115.6,185.1 r180 bottom
R45 "200" 0603 110.9,185.1 r180 bottom
R46 "200" 0603 149,185 r180 bottom
R47 "200" 0603 120.4,185.1 r180 bottom
R48 "200" 0603 125.2,185.1 r180 bottom
R49 "4.7K" 0603 145.5,170 r0 top
R50 "4.7K" 0603 146.7,150.1 r180 top
R51 "4.7K" 0603 134.7,171.9 r0 top
R52 "100" 0603 100,181.4 r270 top
R53 "4.7K" 0603 61.8,91.2 r180 bottom
R54 "4.7K" 0603 63.3,91.2 r180 bottom
R55 "4.7K" 0603 64.8,91.2 r180 bottom
R56 "0" 0603 60.8,168.9 r0 top
R57 "0" 0603 52.4,153.8 r0 top
R58 "2.43K/1%" 0603 57.7,150.9 r270 top
R59 "0" 0603 48.8,168.9 r180 top
R60 "0" 0603 51.825,168.9 r180 top
R61 "0" 0603 54.8,168.9 r180 top
R62 "0" 0603 57.8,168.9 r180 top
R63 "510K" 0603 72.8,168.9 r180 top
R64 "510K" 0603 69.8,168.9 r180 top
R65 "0" 0603 66.8,168.9 r180 top
R66 "0" 0603 63.8,168.9 r180 top
R67 "10K" 0603 62.1,171.9 r180 bottom
R68 "0" 0603 63.6,171.9 r180 bottom
R69 "10K" 0603 71.3,168.9 r180 top
R70 "10K" 0603 68.3,168.9 r180 top
R71 "10K" 0603 65.3,168.9 r180 top
R72 "10K" 0603 62.3,168.9 r180 top
R73 "10K" 0603 55.1,126.5 r180 bottom
R74 "10K" 0603 43.7,123.4 r180 bottom
R75 "10K" 0603 45.2,123.4 r180 bottom
R76 "10K" 0603 49.5,128.1 r270 bottom
R77 "10K" 0603 49.5,129.6 r270 bottom
R78 "10K" 0603 35.3,123.4 r180 bottom
R79 "10K" 0603 29.9,127.1 r90 bottom
R80 "10K" 0603 29.9,128.6 r90 bottom
R81 "10K" 0603 29.9,130.1 r90 bottom
R82 "10K" 0603 35.3,143 r0 bottom
R83 "10K" 0603 29.9,138.3 r90 bottom
R84 "10K" 0603 29.9,136.8 r90 bottom
R85 "10K" 0603 29.9,135.3 r90 bottom
R86 "10K" 0603 42.6,143 r0 bottom
R87 "15K" 0603 40.7,123.4 r180 bottom
R88 "15K" 0603 37.7,123.4 r180 bottom
R89 "15K" 0603 38.3,143 r0 bottom
R90 "15K" 0603 40.6,143 r0 bottom
R91 "10K" 0603 44.1,143 r0 bottom
R92 "10K" 0603 49.5,138.9 r270 bottom
R93 "10K" 0603 49.5,137.4 r270 bottom
R94 "1M" 0603 25.5,133.5 r180 bottom
R95 "100K" 0603 100.3,159.2 r90 bottom
R96 "10K" 0603 102.7,158.9 r0 bottom
R97 "10K" 0603 133.9,163.6 r270 top
R98 "100K" 0603 109.5,159.2 r90 bottom
R99 "10K" 0603 111.9,158.9 r180 bottom
R100 "10K" 0603 133.9,162.1 r270 top
R101 "1K" 0603 129.6,46.4 r270 bottom
R102 "1K" 0603 129.6,43.8 r270 bottom
R103 "0" 0603 103.5,50.2 r0 bottom
R104 "1K" 0603 93,57.2 r0 bottom
R105 "0" 0603 90.5,49 r270 bottom
R106 "10K" 0603 139.7,170 r0 top
R107 "0" 0603 107,68.5 r180 bottom
R108 "10K" 0603 105.5,68.5 r180 bottom
R109 "0" 0603 93.9,68.5 r180 bottom
R110 "10K" 0603 125.3,58.4 r90 bottom
R111 "10K" 0603 125.3,55.8 r90 bottom
R112 "10K" 0603 125.3,53.3 r90 bottom
R113 "10K" 0603 134.2,55.8 r270 bottom
R114 "NC" 0603 95.4,68.5 r180 bottom
R115 "0" 0603 96.9,68.5 r180 bottom
R116 "NC" 0603 98.4,68.5 r180 bottom
R117 "10K" 0603 125.3,50.7 r90 bottom
R118 "0" 0603 134.2,58.4 r270 bottom
R119 "10K" 0603 114.6,47.7 r0 bottom
R120 "0" 0603 116.1,47.7 r0 bottom
R121 "1K" 0603 22.4,36.5 r0 top
R122 "1K" 0603 20.9,36.5 r180 top
R123 "10K" 0603 34.8,32.4 r270 top
R124 "1K" 0603 31.4,36.6 r0 top
R125 "4.7K" 0603 38.9,34.8 r0 top
R126 "1.2K" 0603 27.9,25.8 r270 top
R127 "1.2K" 0603 31.1,25.8 r90 top
R128 "47K" 0603 37.4,34.8 r180 top
R129 "3M" 0603 114.6,29.3 r0 top
R130 "3M" 0603 113.1,29.3 r0 top
R131 "75" 0603 112.8,40.7 r180 top
R132 "75" 0603 114.3,40.7 r180 top
R133 "75" 0603 116.5,27 r270 top
R134 "10K" 0603 141.2,170 r0 top
R135 "4.7K" 0603 98.3,22.4 r270 top
R136 "75" 0603 102.3,40.7 r180 top
R137 "75" 0603 103.8,40.7 r180 top
R138 "75" 0603 100.3,30.2 r270 top
R139 "10K" 0603 133.9,159.5 r90 top
R140 "51" 0603 108.6,143.1 r90 top
R141 "2K" 0603 97.4,149 r180 bottom
R142 "1K" 0603 100.1,151.6 r90 bottom
R143 "510" 0603 93.1,144.4 r180 bottom
R144 "510" 0603 90.1,144.4 r180 bottom
R145 "1K" 0603 105,151.6 r270 bottom
R146 "510" 0603 94.6,144.4 r180 bottom
R147 "510" 0603 91.6,144.4 r180 bottom
R148 "51" 0603 100.1,153.1 r90 bottom
R149 "51" 0603 105,153 r270 bottom
R150 "0" 0603 112.4,146.8 r270 bottom
R151 "2K" 0603 107.8,149 r180 bottom
R152 "NC" 0603 50.3,168.9 r180 top
R153 "NC" 0603 53.3,168.9 r180 top
R154 "NC" 0603 56.3,168.9 r180 top
R155 "NC" 0603 59.3,168.9 r180 top
R156 "NC" 0603 142.8,97.8 r180 top
R157 "0" 0603 142.8,101.7 r0 top
R158 "NC" 0603 101.8,172 r90 bottom
R159 "0" 0603 101.8,173.5 r270 bottom
TP17 "Comment" MARK#1 8.4,180.1 r180 bottom locked
TP18 "Comment" MARK#1 156.6,179.9 r180 bottom locked
TP19 "Comment" MARK#1 8.4,18.6 r180 bottom locked
TP20 "Comment" MARK#2 8.4,180.1 r180 bottom locked
TP21 "Comment" MARK#2 8.4,18.6 r180 bottom locked
TP22 "Comment" MARK#2 156.6,179.9 r180 bottom locked
U1 "AMS1117-3.3" AMS1117 149.9,103.1 r270 top
U2 "MP1497DJ" TSOT23-8 146.5,115 r90 top
U3 "MP1497DJ" TSOT23-8 146.5,131.2 r90 top
U4 "LTC3780EG" LTC3780EG 154,84.3 r180 top
U5 "MP1497DJ" TSOT23-8 126.6,115 r90 top
U6 "74HC1G04" SOT753 136.6,149.827 r270 top
U7 "IAP10L14X" LQFP44 139.1,154.3 r90 top
U8 "IR" IR 102.6,184.6 r0 top locked
U9 "MAX6816" SOT143 157.5,171.4 r90 top
U10 "MAX6816" SOT143 152.3,171.4 r90 top
U11 "MAX812R" SOT143 143.1,151 r180 top
U12 "K9F2G08U0C" TSOP48 66.7,94.4 r90 bottom
U13 "74HC1G08" SOT23-5 63.1,169.4 r0 bottom
U14 "uPD720114" LQFP48 57.9,161.4 r0 top
U15 "74HC139" SO-16 55.1,128.9 r90 bottom
U16 "XR16V554IV" LQFP64 43.5,127.1 r90 bottom
U17 "74HC1G04" SOT753 31,143.8 r270 bottom
U18 "STM32F103R8T6" LQFP64_N 105.2,59.3 r180 bottom
U19 "PCA82C251" SO8 94.9,51.6 r0 bottom
U20 "74HC1G04" SOT753 105.4,73.9 r270 bottom
U21 "74HC1G08" SOT23-5 114.6,50.1 r180 bottom
U22 "MAX485ESA" SO8 20.3,30.8 r180 top
U23 "MAX3232" SO-16 47.4,175.5 r90 top
U24 "MAX485ESA" SO8 29.5,30.8 r180 top
U25 "MAX3232" SO-16 5.4,28 r0 top
U26 "AP1212LS" SO8 98.3,176.9 r270 bottom
U27 "MAX811R" SOT143 39.5,154.1 r270 top
U28 "PCF8563T" SO8 28.8,161.7 r0 top
U29 "THS7314" SO8 114.7,35.1 r0 top
U30 "74HC1G04" SOT753 96.7,25.8 r0 top
U31 "THS7314" SO8 104.2,35.1 r0 top
U32 "MAX6816" SOT143 24.9,13.8 r180 bottom
U33 "THS4521" SO8 102.6,147.9 r270 bottom
Y1 "25MHz" XTAL_SMD 158.4,164.5 r270 top
Y2 "30MHz" XTAL_SMD 49,150.4 r90 top
Y3 "14.7456MHz" XTAL_SMD 22.2,128.4 r90 bottom
Y4 "12MHz" XTAL_SMD 118.8,71.5 r270 bottom
Y5 "32.768KHz" XTAL 27,154.6 r90 top

## Footprints (in the part's own frame and the unit in brackets; to place one, negate y for a bottom-side part, rotate by r counter-clockwise, add the part's x,y. Pads: shape width x height; smd on the part's side, far side on the other; paste and mask are expansions set on the pad)
1N5819 [mm]
  rect 1x1 smd: 1(2.7,0) 2(0,0)
  silkscreen extent -0.75,-0.7 3.45,0.7
0603 [mm]
  rect 1x0.9 smd: 1(0,0.8) 2(0,-0.8)
  silkscreen extent -0.6,-1.4 0.6,1.4
0805 [mm]
  rect 1.2x1.3 smd: 1(0,0) 2(1.8,0)
  silkscreen extent -0.8,-0.9 2.6,0.9
1210 [mm]
  rect 1.6x3 smd: 1(0,0) 2(3.2,0)
  silkscreen extent -1.1,-1.8 4.3,1.8
1812 [mm]
  rect 2x3.3 smd: 1(0,0) 2(3.8,0)
  silkscreen extent -1.2,-1.9 5,1.9
2512 [mm]
  rect 1.65x3.2 smd: 1(0,0) 2(6.48,0)
  silkscreen extent -1.1,-1.9 7.6,1.9
3528 [mil]
  rect 75x90 smd: 1(0,0) 2(-135,0)
  silkscreen extent -195,-65 65,65
5557-4PIN [mm]
  rect 2.7x2.7 hole 1.7: 1(0,0)
  round 2.7 hole 1.7: 2(5.5,0) 3(0,-4.2) 4(5.5,-4.2)
  silkscreen extent 7.3,-7 19,2.7
AMS1117 [mm]
  rect 1x1.5 smd: 1(-2.3,0) 2(0,0) 3(2.3,0)
  rect 3.3x1.5 smd: 4(0,6.3)
  silkscreen extent -3.3,1 3.3,5.3
B320A [mm]
  rect 1.6x1.6 smd: 1(0,0) 2(4.8,0)
  silkscreen extent -1,-1.5 5.8,1.5
BNX002-001 [mm]
  round 2 hole 1.2: 1(2.5,2.5) 2(-2.5,2.5) 4(5,0) 5(0,0)
  oval 2x2.2 hole 1.2: 3(2.5,-2.5)
  oval 2.2x2 hole 1.2: 6(-2.5,-2.5)
  silkscreen extent -6,-5.5 6,5.5
COMM-3MM-2X10 [mm]
  rect 1.8x1.8 hole 1.1: 1(0,-3)
  round 1.8 hole 1.1: 2(0,0) 3(3,-3) 4(3,0) 5(6,-3) 6(6,0) 7(9,-3) 8(9,0) 9(12,-3) 10(12,0) 11(15,-3) 12(15,0) 13(18,-3) 14(18,0) 15(21,-3) 16(21,0) 17(24,-3) 18(24,0) 19(27,-3) 20(27,0)
  Keep-Out Layer circle w0.2: c2.2,-7.3 r1.5
  Keep-Out Layer circle w0.2: c24.8,-7.3 r1.5
  silkscreen extent -3.3,-11.9 30.3,1
COMM_BOARD_2 [mm]
  rect 1.4x1.4 hole 0.9: 1(2.5,9)
  round 1.4 hole 0.9: 2(4.5,9) 3(2.5,11) 4(4.5,11) 5(2.5,13) 6(4.5,13) 7(2.5,15) 8(4.5,15) 9(2.5,17) 10(4.5,17) 11(2.5,19) 12(4.5,19) 13(2.5,21) 14(4.5,21) 15(2.5,23) 16(4.5,23) 17(2.5,25) 18(4.5,25) 19(2.5,27) 20(4.5,27) 21(2.5,29) 22(4.5,29) 23(2.5,31) 24(4.5,31) 25(2.5,33) 26(4.5,33) 27(2.5,35) 28(4.5,35) 29(2.5,37) 30(4.5,37) 31(2.5,39) 32(4.5,39) 33(2.5,41) 34(4.5,41)
  round 4.5 hole 2: MT9(2.5,2.5) MT10(16.5,47.5) MT11(127.5,2.5) MT12(127.5,47.5)
  silkscreen extent 0,0 130,50
CON-2PIN [mm]
  rect 1.9x1.9 hole 1: 1(0,0)
  round 1.9 hole 1: 2(-2.54,0)
  silkscreen extent -5.58,-2.6 2.99,3.99
CONN2X10 [mm]
  rect 1.8x1.8 hole 1: 1(-4,0)
  round 1.8 hole 1: 2(0,0) 3(-4,-2.54) 4(0,-2.54) 5(-4,-5.08) 6(0,-5.08) 7(-4,-7.62) 8(0,-7.62) 9(-4,-10.16) 10(0,-10.16) 11(-4,-12.7) 12(0,-12.7) 13(-4,-15.24) 14(0,-15.24) 15(-4,-17.78) 16(0,-17.78) 17(-4,-20.32) 18(0,-20.32) 19(-4,-22.86) 20(0,-22.86)
  Keep-Out Layer circle w0.2: c-8.8,5.72 r1.15
  Keep-Out Layer circle w0.2: c-8.8,-28.58 r1.15
  silkscreen extent -21.2,-31.28 -2.7,8.42
CR1220 [mm]
  rect 5x2.2 smd: 1(7.8,0) 2(-7.35,0)
  Keep-Out Layer circle w0.1: c-3.5,0 r0.5
  Keep-Out Layer circle w0.1: c3.75,0 r0.6
  silkscreen extent -7.32,-7.5 7.8,7.53
DL-8*10.5 [mm]
  rect 1.5x4 smd: 1(0,3.5) 2(0,-3.5)
  silkscreen extent -4,-4 4,4
DL-10*10.5 [mm]
  rect 1.5x4.5 smd: 1(0,4.4) 2(0,-4.5)
  silkscreen extent -5,-5 5,5
DO214AB [mm]
  rect 2x3.4 smd: 1(7,0) 2(0,0)
  silkscreen extent -1.3,-3.3 8.3,3.3
EM9008 [mm]
  rect 1.4x1.4 hole 0.9: A1(86.9,71.1) C1(6.749,2.048)
  round 1.4 hole 0.9: A2(86.9,69.1) A3(84.9,71.1) A4(84.9,69.1) A5(82.9,71.1) A6(82.9,69.1) A7(80.9,71.1) A8(80.9,69.1) A9(78.9,71.1) A10(78.9,69.1) A11(76.9,71.1) A12(76.9,69.1) A13(74.9,71.1) A14(74.9,69.1) A15(72.9,71.1) A16(72.9,69.1) A17(70.9,71.1) A18(70.9,69.1) A19(68.9,71.1) A20(68.9,69.1) A21(66.9,71.1) A22(66.9,69.1) A23(64.9,71.1) A24(64.9,69.1) A25(62.9,71.1) A26(62.9,69.1) A27(60.9,71.1) A28(60.9,69.1) A29(58.9,71.1) A30(58.9,69.1) A31(56.9,71.1) A32(56.9,69.1) A33(54.9,71.1) A34(54.9,69.1) A35(52.9,71.1) A36(52.9,69.1) A37(50.9,71.1) A38(50.9,69.1) A39(48.9,71.1) A40(48.9,69.1) A41(46.9,71.1) A42(46.9,69.1) A43(44.9,71.1) A44(44.9,69.1) A45(42.9,71.1) A46(42.9,69.1) A47(40.9,71.1) A48(40.9,69.1) A49(38.9,71.1) A50(38.9,69.1) A51(36.9,71.1) A52(36.9,69.1) A53(34.9,71.1) A54(34.9,69.1) A55(32.9,71.1) A56(32.9,69.1) A57(30.9,71.1) A58(30.9,69.1) A59(28.9,71.1) A60(28.9,69.1) B1(45.072,2.048) B2(45.072,4.048) B3(47.072,2.048) B4(47.072,4.048) B5(49.072,2.048) B6(49.072,4.048) B7(51.072,2.048) B8(51.072,4.048) B9(53.072,2.048) B10(53.072,4.048) B11(55.072,2.048) B12(55.072,4.048) B13(57.072,2.048) B14(57.072,4.048) B15(59.072,2.048) B16(59.072,4.048) B17(61.072,2.048) B18(61.072,4.048) B19(63.072,2.048) B20(63.072,4.048) B21(65.072,2.048) B22(65.072,4.048) B23(67.072,2.048) B24(67.072,4.048) B25(69.072,2.048) B26(69.072,4.048) B27(71.072,2.048) B28(71.072,4.048) B29(73.072,2.048) B30(73.072,4.048) B31(75.072,2.048) B32(75.072,4.048) B33(77.072,2.048) B34(77.072,4.048) B35(79.072,2.048) B36(79.072,4.048) B37(81.072,2.048) B38(81.072,4.048) B39(83.072,2.048) B40(83.072,4.048) B41(85.072,2.048) B42(85.072,4.048) B43(87.072,2.048) B44(87.072,4.048) B45(89.072,2.048) B46(89.072,4.048) B47(91.072,2.048) B48(91.072,4.048) C2(6.749,4.048) C3(8.749,2.048) C4(8.749,4.048) C5(10.749,2.048) C6(10.749,4.048) C7(12.749,2.048) C8(12.749,4.048) C9(14.749,2.048) C10(14.749,4.048) C11(16.749,2.048) C12(16.749,4.048) C13(18.749,2.048) C14(18.749,4.048) C15(20.749,2.048) C16(20.749,4.048) C17(22.749,2.048) C18(22.749,4.048) C19(24.749,2.048) C20(24.749,4.048) C21(26.749,2.048) C22(26.749,4.048) C23(28.749,2.048) C24(28.749,4.048) C25(30.749,2.048) C26(30.749,4.048) C27(32.749,2.048) C28(32.749,4.048) C29(34.749,2.048) C30(34.749,4.048) C31(36.749,2.048) C32(36.749,4.048) C33(38.749,2.048) C34(38.749,4.048) C35(40.749,2.048) C36(40.749,4.048)
  round 6 hole 3: MT5(95.25,68.895) MT6(3.81,68.895) MT7(95.25,9.586) MT8(3.81,9.586)
  silkscreen extent 0,0 99.06,73.41
G5V-1 [mm]
  rect 1.8x1.8 hole 1: 1(-2.54,5.08)
  round 1.8 hole 1: 2(-2.54,2.54) 5(-2.54,-5.08) 6(2.54,-5.08) 9(2.54,2.54) 10(2.54,5.08)
  silkscreen extent -3.7,-6.5 3.7,6.5
HDD-CONN [mm]
  rect 1.9x1.9 hole 1: 1(12.7,0)
  round 1.9 hole 1: 2(10.16,0) 3(7.62,0) 4(5.08,0) 5(2.54,0) 6(0,0)
  silkscreen extent -3,-4 15.7,2.51
HDR2X2H [mm]
  rect 1.5x1.5 hole 0.9: 1(-2.54,0)
  round 1.5 hole 0.9: 2(-2.54,2.54) 3(0,0) 4(0,2.54)
  silkscreen extent -4.74,-10.26 2.2,3.81
HDR2X5 [mm] "Connector; Header; 5x2 Position"
  rect 1.5x1.5 hole 0.9: 1(0,0)
  round 1.5 hole 0.9: 2(0,2.54) 3(2.54,0) 4(2.54,2.54) 5(5.08,0) 6(5.08,2.54) 7(7.62,0) 8(7.62,2.54) 9(10.16,0) 10(10.16,2.54)
  silkscreen extent -1.27,-1.27 11.43,3.81
IND-4.7UH-4A [mm]
  rect 2.2x1.6 smd: 1(0,-3.3) 2(0,3.3)
  silkscreen extent -3.2,-3.2 3.2,3.2
IND-8.2UH-10A [mm]
  rect 5.4x3 smd: 1(0,5) 2(0,-5)
  silkscreen extent -6,-6 6,6
IR [mm]
  rect 1.3x1.3 hole 0.8: 1(-5.1,0)
  round 1.3 hole 0.8: 2(-2.56,0) 3(0,0)
  silkscreen extent -5.9,-2.25 0.8,3.1
LED0603 [mm]
  rect 1x0.9 smd: 1(0,0) 2(0,-1.6)
  silkscreen extent -0.7,-2.5 0.7,0.6
LED-3MM [mm]
  round 1.2 hole 0.7: 1(2.5,0) 2(0,0)
  silkscreen extent -0.75,-0.8 3.25,5
LQFP44 [mm]
  oval 1.6x0.4 smd: 1(0,0)
  rect 1.6x0.4 smd: 2(0,-0.8) 3(0,-1.6) 4(0,-2.4) 5(0,-3.2) 6(0,-4) 7(0,-4.8) 8(0,-5.6) 9(0,-6.4) 10(0,-7.2) 11(0,-8) 23(12,-8) 24(12,-7.2) 25(12,-6.4) 26(12,-5.6) 27(12,-4.8) 28(12,-4) 29(12,-3.2) 30(12,-2.4) 31(12,-1.6) 32(12,-0.8) 33(12,0)
  rect 0.4x1.6 smd: 12(2,-10) 13(2.8,-10) 14(3.6,-10) 15(4.4,-10) 16(5.2,-10) 17(6,-10) 18(6.8,-10) 19(7.6,-10) 20(8.4,-10) 21(9.2,-10) 22(10,-10) 34(10,2) 35(9.2,2) 36(8.4,2) 37(7.6,2) 38(6.8,2) 39(6,2) 40(5.2,2) 41(4.4,2) 42(3.6,2) 43(2.8,2) 44(2,2)
  silkscreen extent 1.33,-8.67 10.67,0.67
LQFP48 [mm]
  oval 1.2x0.3 smd: 1(0,0)
  rect 1.2x0.3 smd: 2(0,-0.5) 3(0,-1) 4(0,-1.5) 5(0,-2) 6(0,-2.5) 7(0,-3) 8(0,-3.5) 9(0,-4) 10(0,-4.5) 11(0,-5) 12(0,-5.5) 25(9,-5.5) 26(9,-5) 27(9,-4.5) 28(9,-4) 29(9,-3.5) 30(9,-3) 31(9,-2.5) 32(9,-2) 33(9,-1.5) 34(9,-1) 35(9,-0.5) 36(9,0)
  rect 0.3x1.2 smd: 13(1.75,-7.25) 14(2.25,-7.25) 15(2.75,-7.25) 16(3.25,-7.25) 17(3.75,-7.25) 18(4.25,-7.25) 19(4.75,-7.25) 20(5.25,-7.25) 21(5.75,-7.25) 22(6.25,-7.25) 23(6.75,-7.25) 24(7.25,-7.25) 37(7.25,1.75) 38(6.75,1.75) 39(6.25,1.75) 40(5.75,1.75) 41(5.25,1.75) 42(4.75,1.75) 43(4.25,1.75) 44(3.75,1.75) 45(3.25,1.75) 46(2.75,1.75) 47(2.25,1.75) 48(1.75,1.75)
  silkscreen extent 1.13,-6.11 7.86,0.62
LQFP64 [mm]
  oval 2x0.27 smd: 1(0,0)
  rect 2x0.27 smd: 2(0,-0.5) 3(0,-1) 4(0,-1.5) 5(0,-2) 6(0,-2.5) 7(0,-3) 8(0,-3.5) 9(0,-4) 10(0,-4.5) 11(0,-5) 12(0,-5.5) 13(0,-6) 14(0,-6.5) 15(0,-7) 16(0,-7.5) 33(12.2,-7.5) 34(12.2,-7) 35(12.2,-6.5) 36(12.2,-6) 37(12.2,-5.5) 38(12.2,-5) 39(12.2,-4.5) 40(12.2,-4) 41(12.2,-3.5) 42(12.2,-3) 43(12.2,-2.5) 44(12.2,-2) 45(12.2,-1.5) 46(12.2,-1) 47(12.2,-0.5) 48(12.2,0)
  rect 0.27x2 smd: 17(2.35,-9.85) 18(2.85,-9.85) 19(3.35,-9.85) 20(3.85,-9.85) 21(4.35,-9.85) 22(4.85,-9.85) 23(5.35,-9.85) 24(5.85,-9.85) 25(6.35,-9.85) 26(6.85,-9.85) 27(7.35,-9.85) 28(7.85,-9.85) 29(8.35,-9.85) 30(8.85,-9.85) 31(9.35,-9.85) 32(9.85,-9.85) 49(9.85,2.35) 50(9.35,2.35) 51(8.85,2.35) 52(8.35,2.35) 53(7.85,2.35) 54(7.35,2.35) 55(6.85,2.35) 56(6.35,2.35) 57(5.85,2.35) 58(5.35,2.35) 59(4.85,2.35) 60(4.35,2.35) 61(3.85,2.35) 62(3.35,2.35) 63(2.85,2.35) 64(2.35,2.35)
  silkscreen extent 1.54,-8.31 10.66,0.81
LQFP64_N [mm] "Thin QFP, 64-Leads, Body 10x10mm, Pitch 0.5mm, IPC Medium Density"
  oval 1.8x0.3 smd: 1(-5.55,3.75) 2(-5.55,3.25) 3(-5.55,2.75) 4(-5.55,2.25) 5(-5.55,1.75) 6(-5.55,1.25) 7(-5.55,0.75) 8(-5.55,0.25) 9(-5.55,-0.25) 10(-5.55,-0.75) 11(-5.55,-1.25) 12(-5.55,-1.75) 13(-5.55,-2.25) 14(-5.55,-2.75) 15(-5.55,-3.25) 16(-5.55,-3.75) 33(5.55,-3.75) 34(5.55,-3.25) 35(5.55,-2.75) 36(5.55,-2.25) 37(5.55,-1.75) 38(5.55,-1.25) 39(5.55,-0.75) 40(5.55,-0.25) 41(5.55,0.25) 42(5.55,0.75) 43(5.55,1.25) 44(5.55,1.75) 45(5.55,2.25) 46(5.55,2.75) 47(5.55,3.25) 48(5.55,3.75)
  oval 0.3x1.8 smd: 17(-3.75,-5.55) 18(-3.25,-5.55) 19(-2.75,-5.55) 20(-2.25,-5.55) 21(-1.75,-5.55) 22(-1.25,-5.55) 23(-0.75,-5.55) 24(-0.25,-5.55) 25(0.25,-5.55) 26(0.75,-5.55) 27(1.25,-5.55) 28(1.75,-5.55) 29(2.25,-5.55) 30(2.75,-5.55) 31(3.25,-5.55) 32(3.75,-5.55) 49(3.75,5.55) 50(3.25,5.55) 51(2.75,5.55) 52(2.25,5.55) 53(1.75,5.55) 54(1.25,5.55) 55(0.75,5.55) 56(0.25,5.55) 57(-0.25,5.55) 58(-0.75,5.55) 59(-1.25,5.55) 60(-1.75,5.55) 61(-2.25,5.55) 62(-2.75,5.55) 63(-3.25,5.55) 64(-3.75,5.55)
  silkscreen extent -5.68,-4.25 4.25,4.57, body extent -5,-5 5,5, height 1.6
LTC3780EG [mm]
  rect 1.25x0.42 smd: 1(0,0)
  oval 1.25x0.42 smd: 2(0,-0.65) 3(0,-1.3) 4(0,-1.95) 5(0,-2.6) 6(0,-3.25) 7(0,-3.9) 8(0,-4.55) 9(0,-5.2) 10(0,-5.85) 11(0,-6.5) 12(0,-7.15) 13(6.95,-7.15) 14(6.95,-6.5) 15(6.95,-5.85) 16(6.95,-5.2) 17(6.95,-4.55) 18(6.95,-3.9) 19(6.95,-3.25) 20(6.95,-2.6) 21(6.95,-1.95) 22(6.95,-1.3) 23(6.95,-0.65) 24(6.95,0)
  silkscreen extent 1.46,-7.48 5.49,0.33
MARK#1 [mm]
  round 1 smd far side paste-0.5 mask+0.6: ""(0,0)
  Keep-Out Layer circle w0.2: c0,0 r1.2
MARK#2 [mm]
  round 1 smd paste-0.5 mask+0.6: ""(0,0)
  Keep-Out Layer circle w0.2: c0,0 r1.2
MINI-MELF [mil]
  rect 60x60 smd: 1(135,0) 2(0,0)
  silkscreen extent -39,-39 173,39
MM3Z5V1ST1G [mm]
  rect 1x1 smd: 1(-1.35,0) 2(1.35,0)
  silkscreen extent -2.1,-0.7 2.1,0.7
MOSFET [mil]
  rect 36x36 smd: 1(0,0) 2(75,0)
  rect 36x50 smd: 3(38,80)
  silkscreen extent -20,-5 95,85
NPN [mil]
  rect 36x50 smd: 1(38,80)
  rect 36x36 smd: 2(0,0) 3(75,0)
  silkscreen extent -20,-5 95,85
PESD2CAN [mil]
  rect 36x36 smd: 1(0,0) 2(75,0)
  rect 36x50 smd: 3(38,80)
  silkscreen extent -20,-5 95,85
POWERPAK [mm]
  rect 1.27x0.6 smd: 1(0,0) 2(0,-1.27) 3(0,-2.54) 4(0,-3.81)
  rect 1.02x0.6 smd: 5(5.45,-3.81) 6(5.45,-2.54) 7(5.45,-1.27) 8(5.45,0)
  rect 3.9x3.8 smd: ""(3.42,-1.92)
  silkscreen extent -1.44,-0.2 -1.04,0.2
RCA2 [mm]
  rrect50% 1.6x4 hole 0.8 slot 3 at 90 deg: 1(-4.8,3.8) 1(4.8,3.8)
  rrect50% 4x2.5 hole 1.5 slot 2 at 0 deg: 2(0,0)
  Keep-Out Layer lines w0.1: 5,-0.1 5,-2.5 3.2,-2.5 3.2,-0.1 5,-0.1 ; -3.2,-0.1 -3.2,-2.5 -5,-2.5 -5,-0.1 -3.2,-0.1
  silkscreen extent -5.8,-5 5.8,6.3
RJ45 [mm]
  round 1.4 hole 0.9: 1(-4.45,6.35) 2(-3.18,8.89) 3(-1.91,6.35) 4(-0.64,8.89) 5(0.63,6.35) 6(1.9,8.89) 7(3.17,6.35) 8(4.44,8.89)
  round 3 hole 1.6: 9(-7.75,-4.57) 10(7.75,-4.57)
  Keep-Out Layer circle w0.15: c5.72,0 r1.63
  Keep-Out Layer circle w0.15: c-5.72,0 r1.63
  silkscreen extent -7.92,-10.8 7.94,10.39
SO8 [mm] "Small Outline; 8 Leads; Body Width 3.9 mm; Pitch 1.27 mm"
  rect 0.6x2.2 smd: 1(-1.905,-2.6) 2(-0.635,-2.6) 3(0.635,-2.6) 4(1.905,-2.6) 5(1.905,2.6) 6(0.635,2.6) 7(-0.635,2.6) 8(-1.905,2.6)
  silkscreen extent -2.88,-2.72 2.5,1.1
SO-16 [mil] "Small Outline; 16 Leads; Body Width 5.6 mm; Pitch 1.27 mm"
  oval 24x80 smd: 1(0,0) 2(50,0) 3(100,0) 4(150,0) 5(200,0) 6(250,0) 7(300,0) 8(350,0) 9(350,220) 10(300,220) 11(250,220) 12(200,220) 13(150,220) 14(100,220) 15(50,220) 16(0,220)
  silkscreen extent -25,60 375,160
SOD323 [mm]
  rect 1x1 smd: 1(-1.35,0) 2(1.35,0)
  silkscreen extent -2.1,-0.7 2.1,0.7
SOT23-5 [mm]
  rect 0.5x1 smd: 1(0,0) 2(1,0) 3(2,0) 4(2,3) 5(0,3)
  silkscreen extent -0.7,0.6 2.7,2.4
SOT23-6 [mm]
  rect 0.5x1 smd: 1(0,0) 2(1,0) 3(2,0) 4(2,3) 5(1,3) 6(0,3)
  silkscreen extent -0.7,0.6 2.7,2.4
SOT143 [mm] "SOT-143; 4 Leads; Body 3 x 2.5 mm, inc. leads (LxW max)"
  rect 1.4x1.1 smd: 1(-0.05,0)
  rect 0.95x1.1 smd: 2(1.65,0) 3(1.65,2.4) 4(-0.25,2.4)
  silkscreen extent -1.05,-1.13 2.45,1.9
SOT753 [mm]
  rect 1x0.6 smd: 1(0,0)
  oval 1x0.6 smd: 2(0,-0.95) 3(0,-1.9) 4(3,-1.9) 5(3,0)
  silkscreen extent -1.2,-2.5 3,0.6
TSOP48 [mm]
  rect 1x0.3 smd: 1(0,0)
  oval 1x0.3 smd: 2(0,-0.5) 3(0,-1) 4(0,-1.5) 5(0,-2) 6(0,-2.5) 7(0,-3) 8(0,-3.5) 9(0,-4) 10(0,-4.5) 11(0,-5) 12(0,-5.5) 13(0,-6) 14(0,-6.5) 15(0,-7) 16(0,-7.5) 17(0,-8) 18(0,-8.5) 19(0,-9) 20(0,-9.5) 21(0,-10) 22(0,-10.5) 23(0,-11) 24(0,-11.5) 25(20,-11.5) 26(20,-11) 27(20,-10.5) 28(20,-10) 29(20,-9.5) 30(20,-9) 31(20,-8.5) 32(20,-8) 33(20,-7.5) 34(20,-7) 35(20,-6.5) 36(20,-6) 37(20,-5.5) 38(20,-5) 39(20,-4.5) 40(20,-4) 41(20,-3.5) 42(20,-3) 43(20,-2.5) 44(20,-2) 45(20,-1.5) 46(20,-1) 47(20,-0.5) 48(20,0)
  silkscreen extent 1.33,-11.75 18.67,0.25
TSOT23-8 [mm]
  rect 1.2x0.3 smd: 1(0,0)
  oval 1.2x0.3 smd: 2(0,-0.65) 3(0,-1.3) 4(0,-1.95) 5(2.6,-1.95) 6(2.6,-1.3) 7(2.6,-0.65) 8(2.6,0)
  silkscreen extent -1.2,-2.4 3.4,0.4
USB-HOST [mm]
  round 1.4 hole 0.9: 1(-7,0) 2(-4.5,0) 3(-2.5,0) 4(0,0)
  round 3.3 hole 2.3: 5(-10,-2.7) 6(3,-2.7)
  silkscreen extent -10,-13 3,1
V20100SG [mm]
  round 2 hole 1.1: 1(2.54,0) 2(0,0) 2(5.08,0)
  rect 11x15.5 smd: 1(2.6,11.7)
  silkscreen extent -3.1,1.1 8.3,19.6
XTAL [mm]
  round 0.9 hole 0.5: 1(0,0) 2(1.3,0)
  silkscreen extent -0.9,-8 2.1,-0.7
XTAL_SMD [mm]
  rect 3.5x1.27 smd: 1(10.121,0) 2(0,0)
  silkscreen extent -0.88,-2.5 11.12,2.5